# Altium PCB TS-4900 Yonder Parent.PcbDoc (part 1 of 2)
Units mil, origin at the board's own origin, x right, y up, seen from the top; angles counter-clockwise.
Board outline 3838 x 4094 mil, 4 copper layers (Component Side, Ground Plane, Power Plane, Solder Side), stack 33.234 mil thick; 152 components, 102 nets, 692 pads, 286 vias.
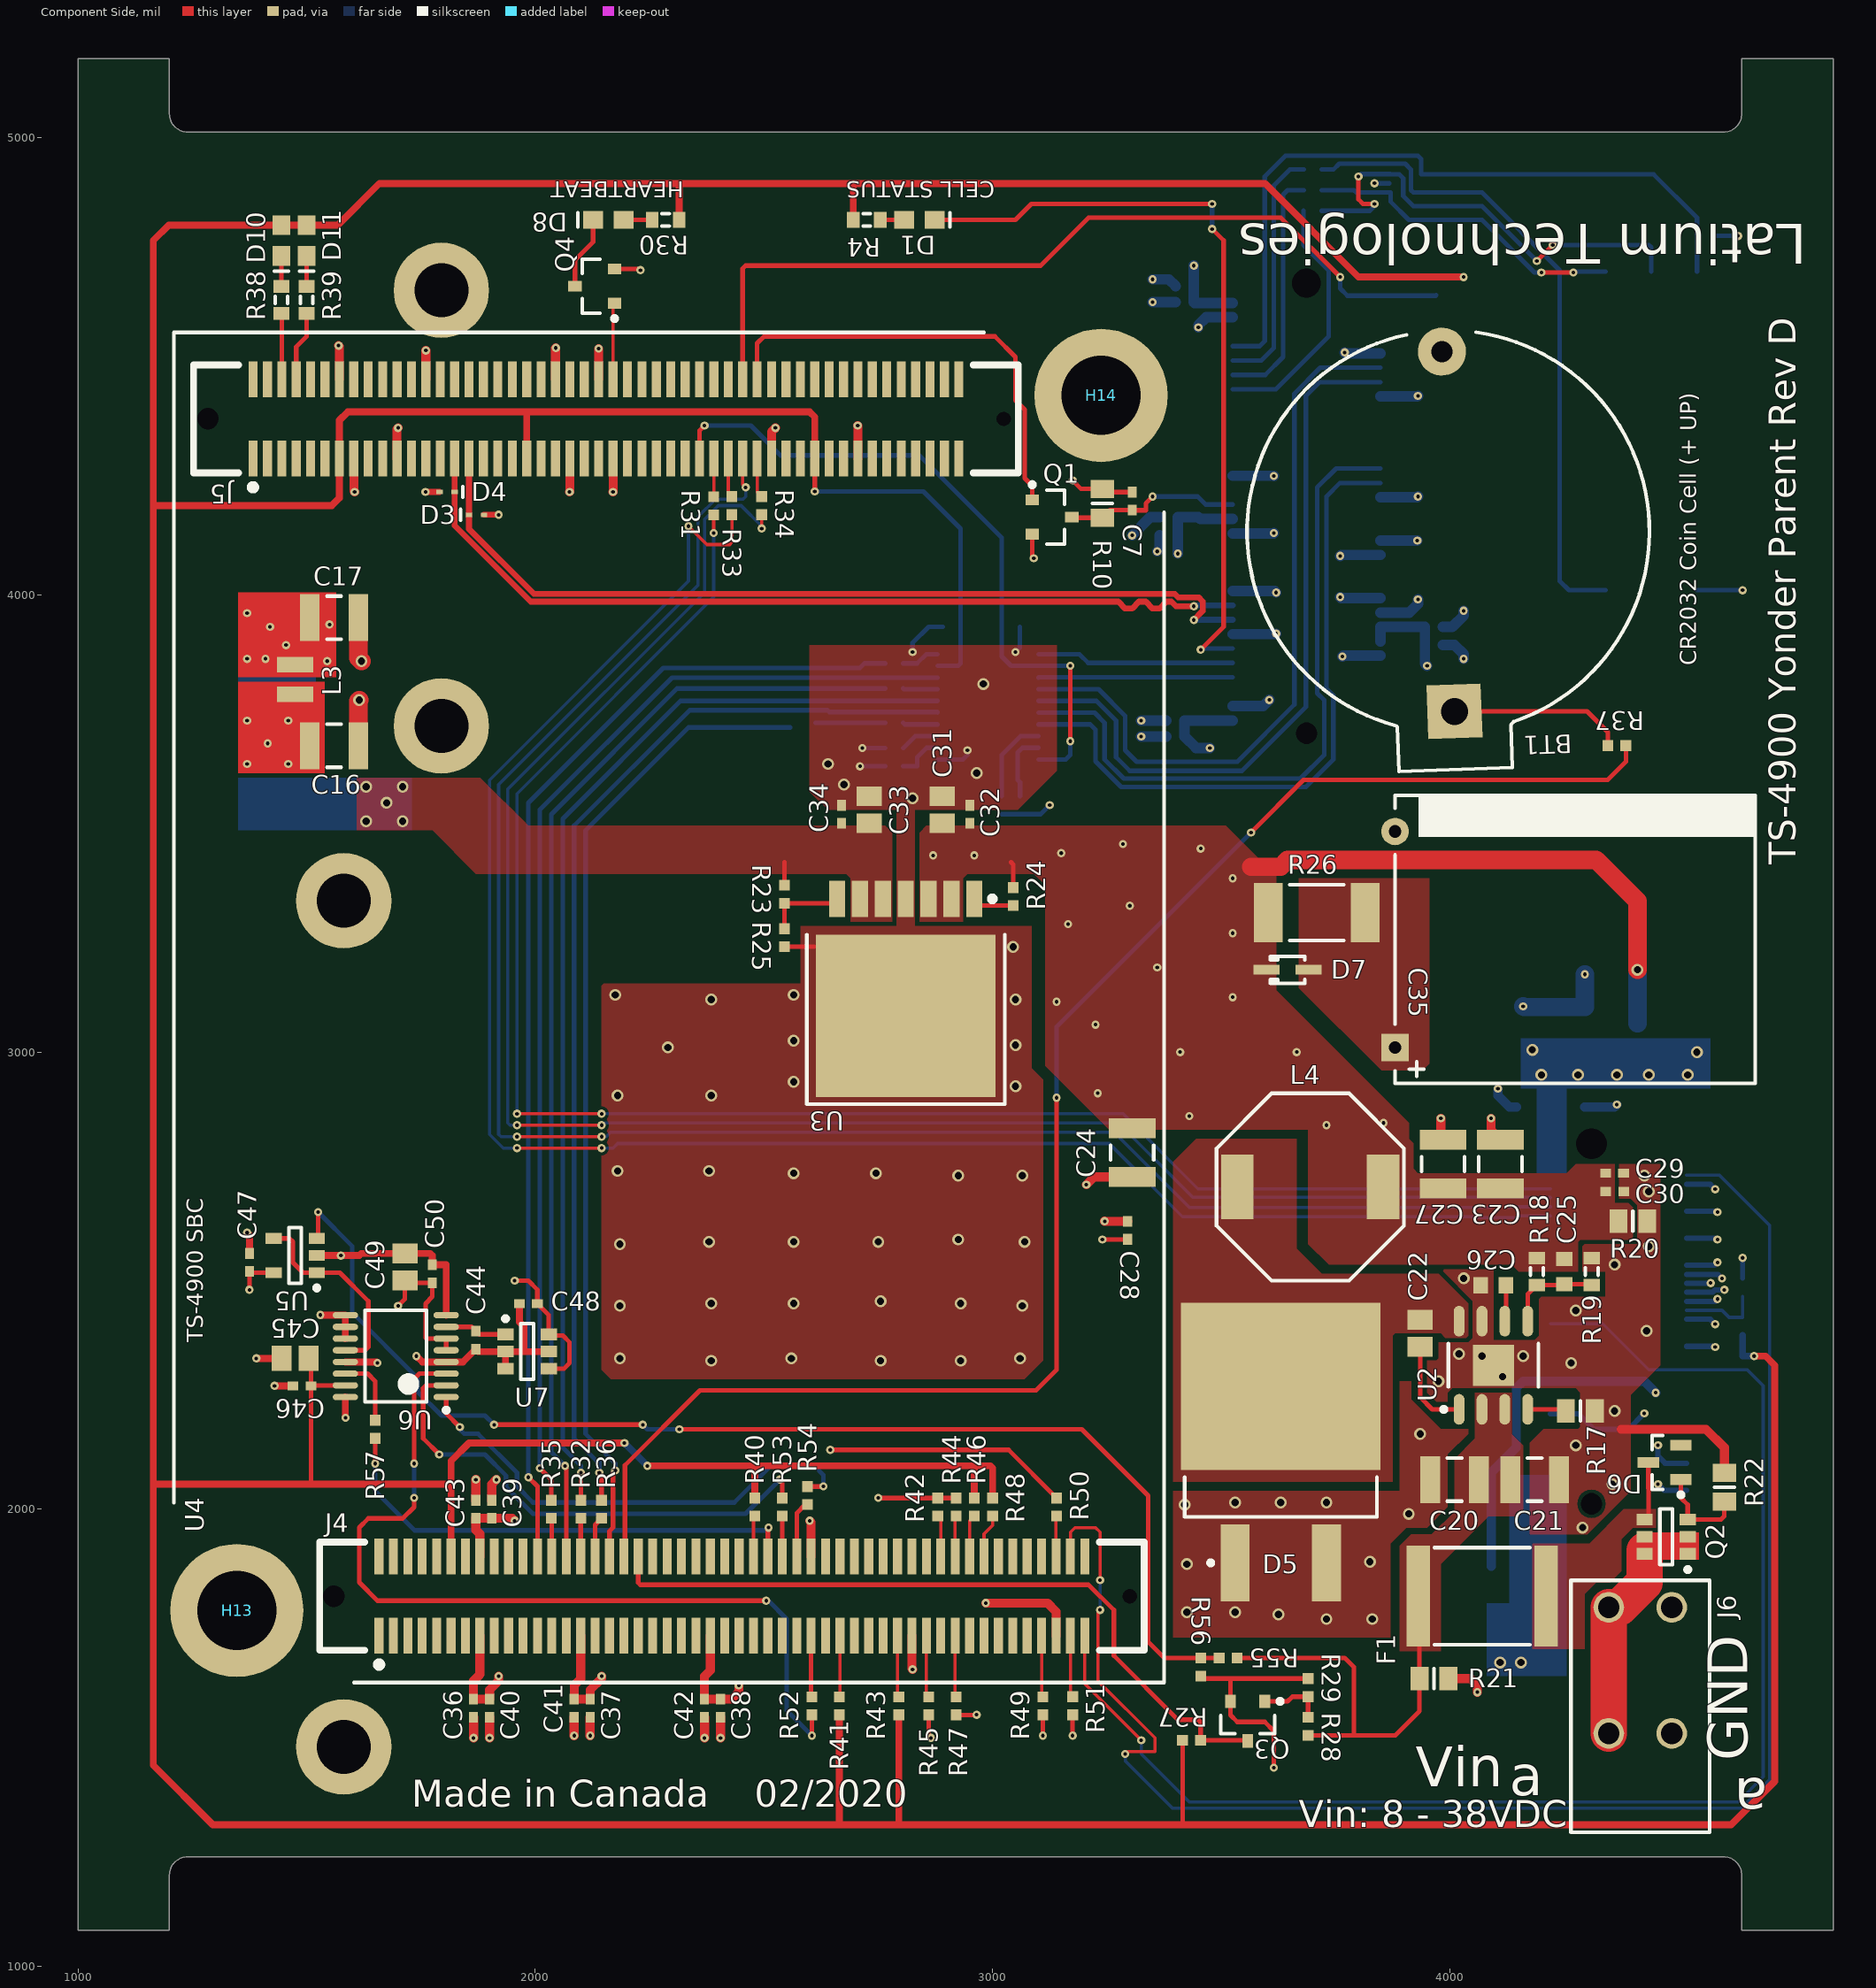
[diagram p0: Component Side view]
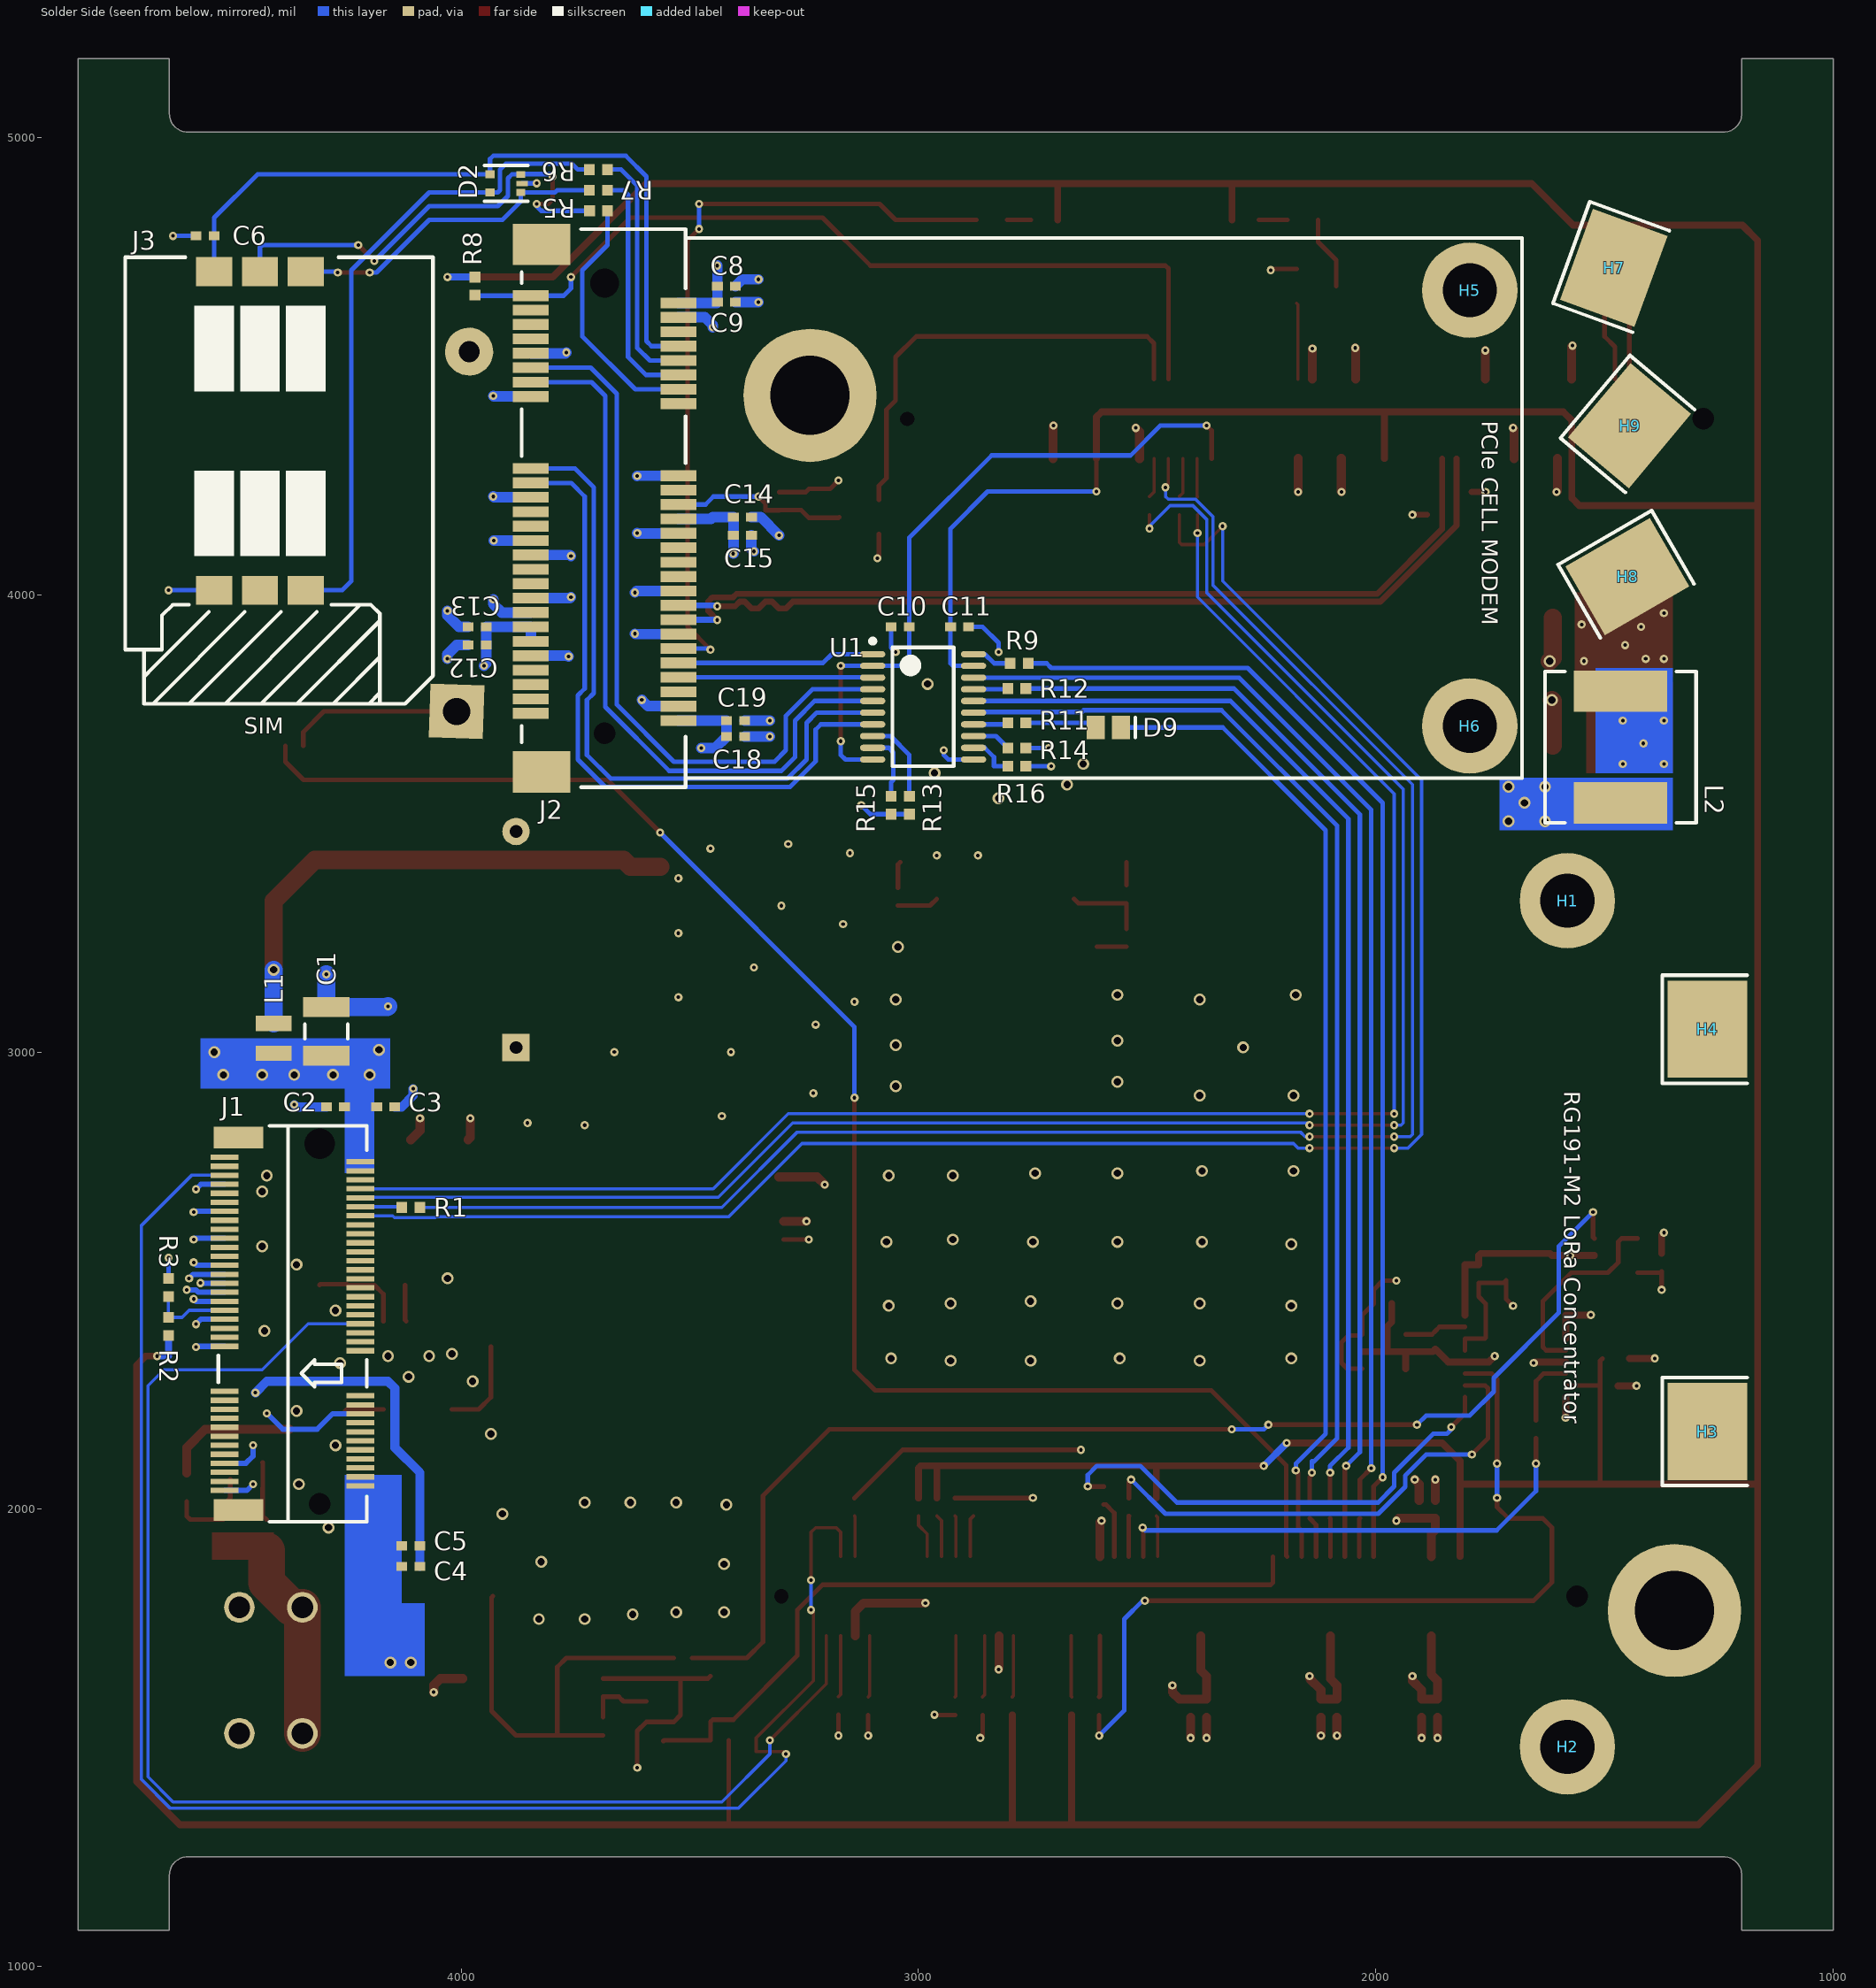
[diagram p1: Solder Side view, seen from below]
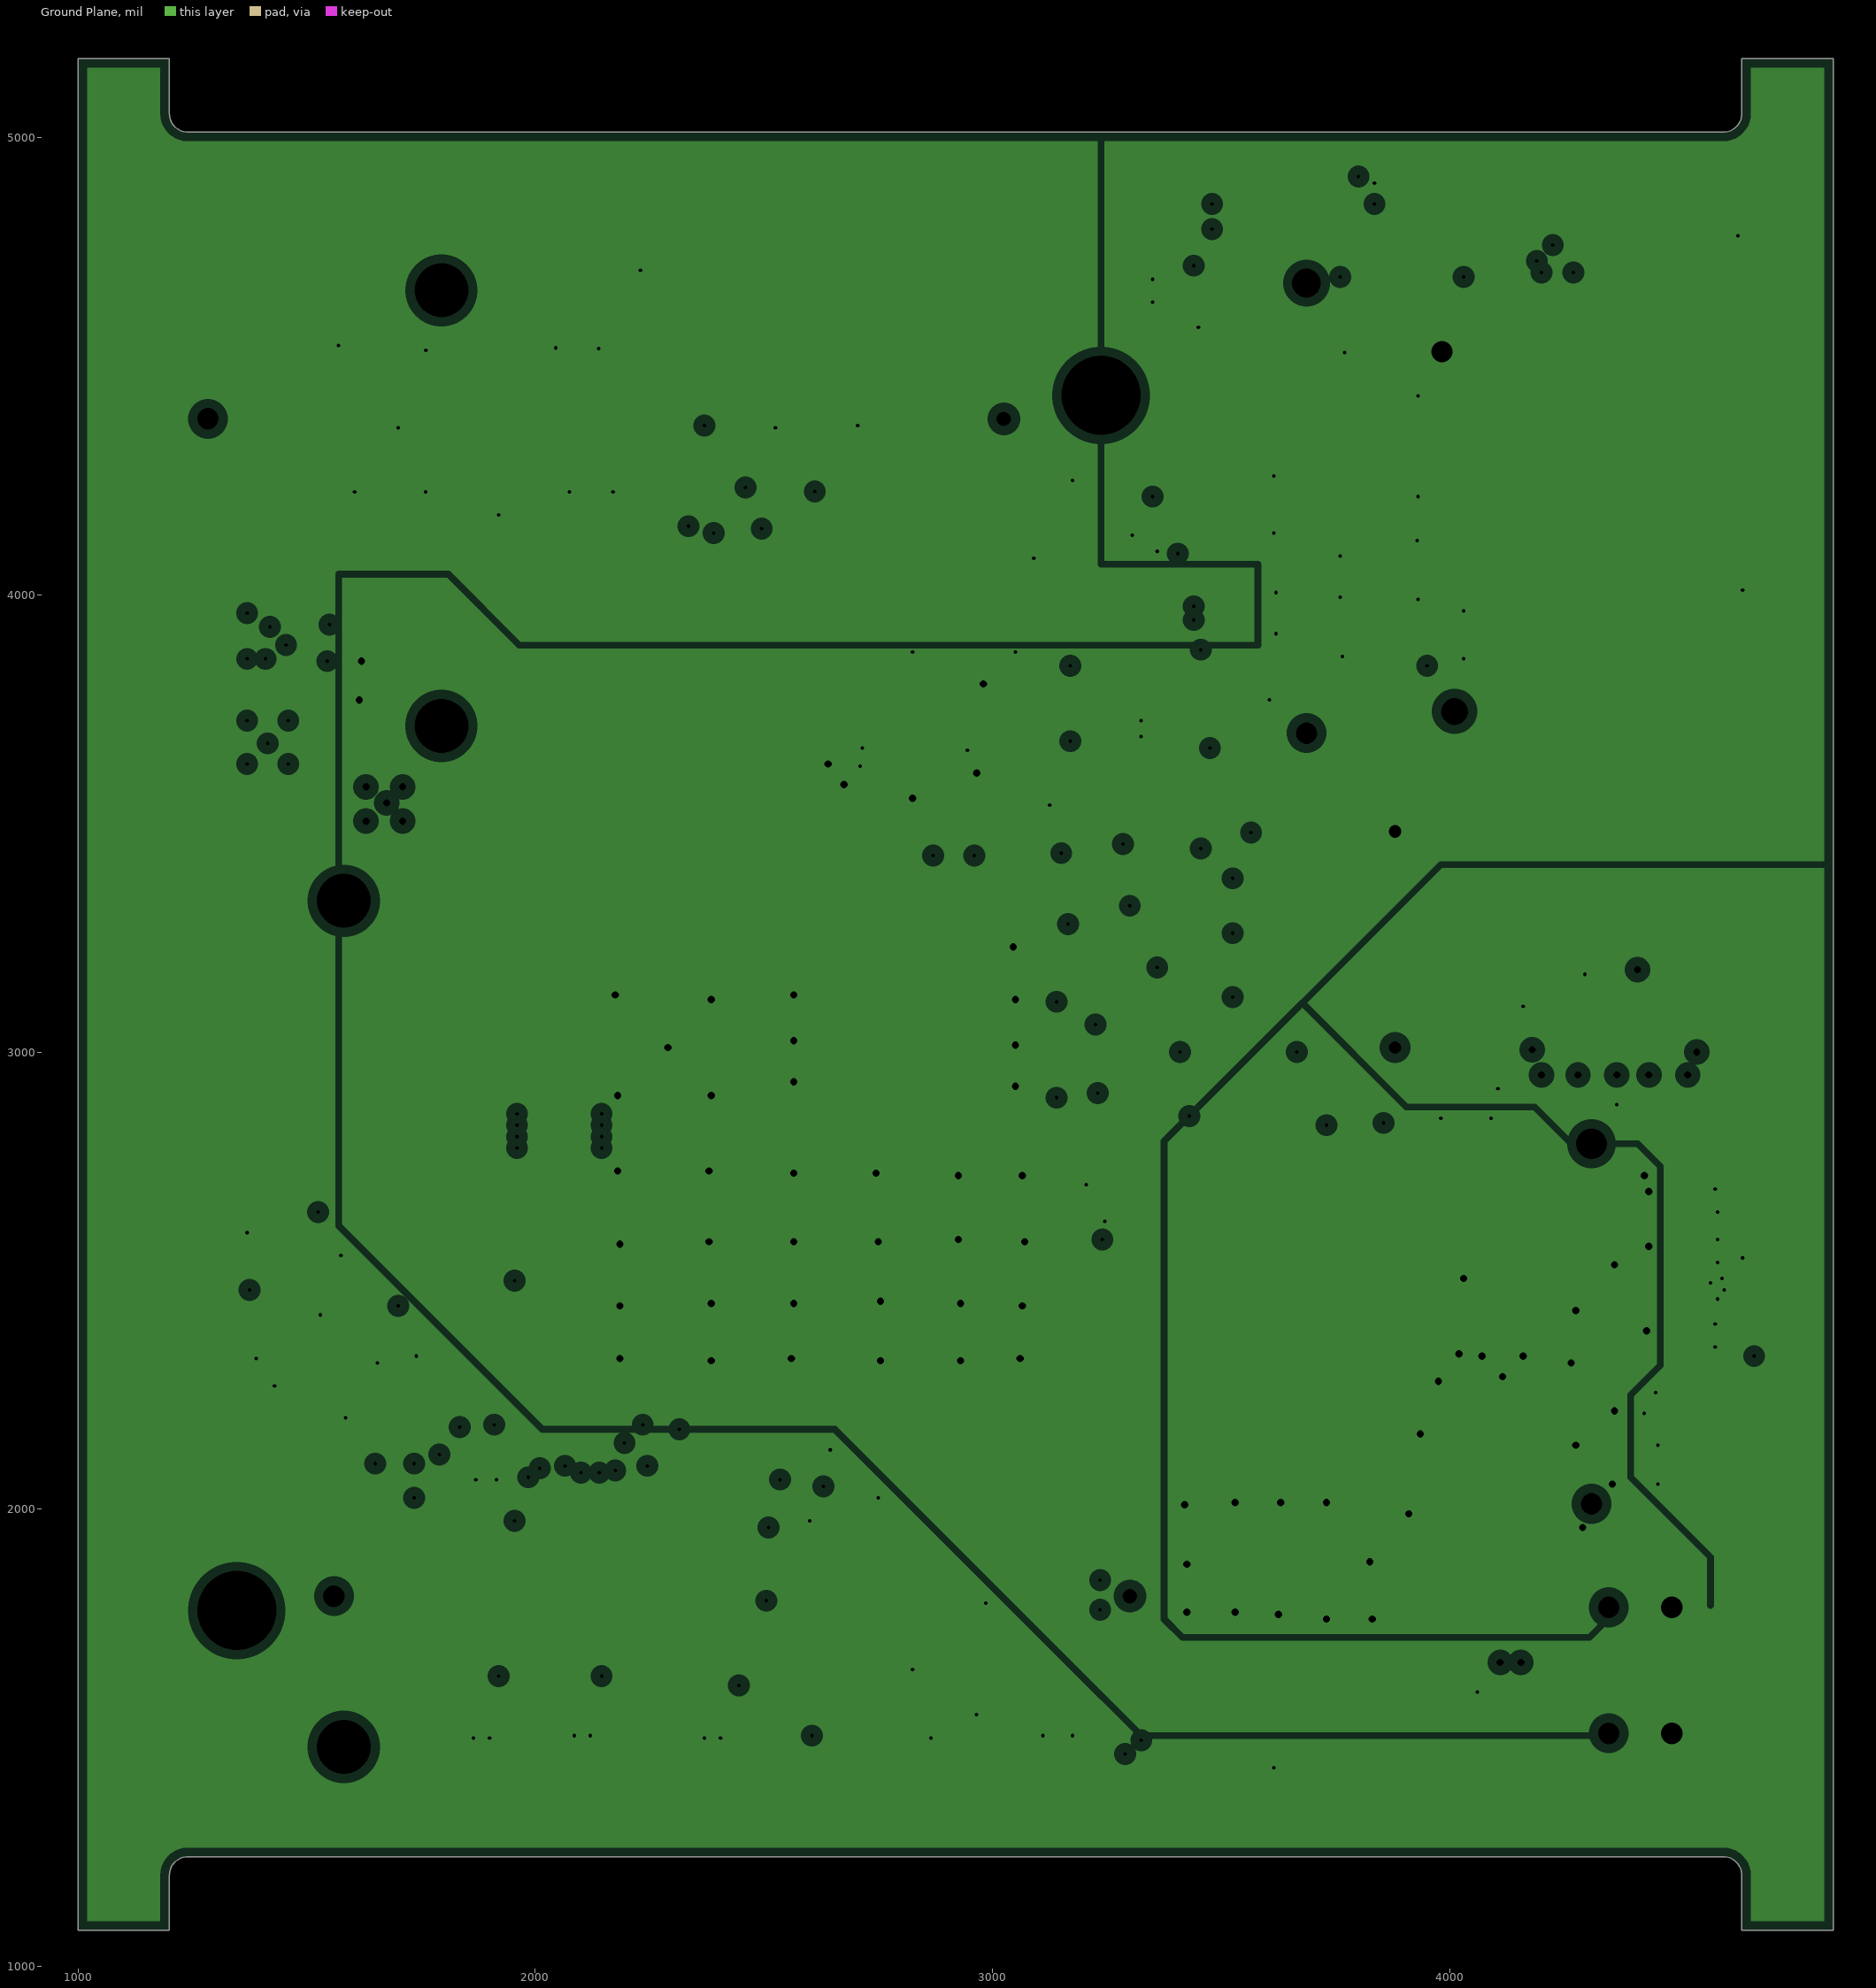
[diagram p2: Ground Plane, clearances drawn from the general rule]
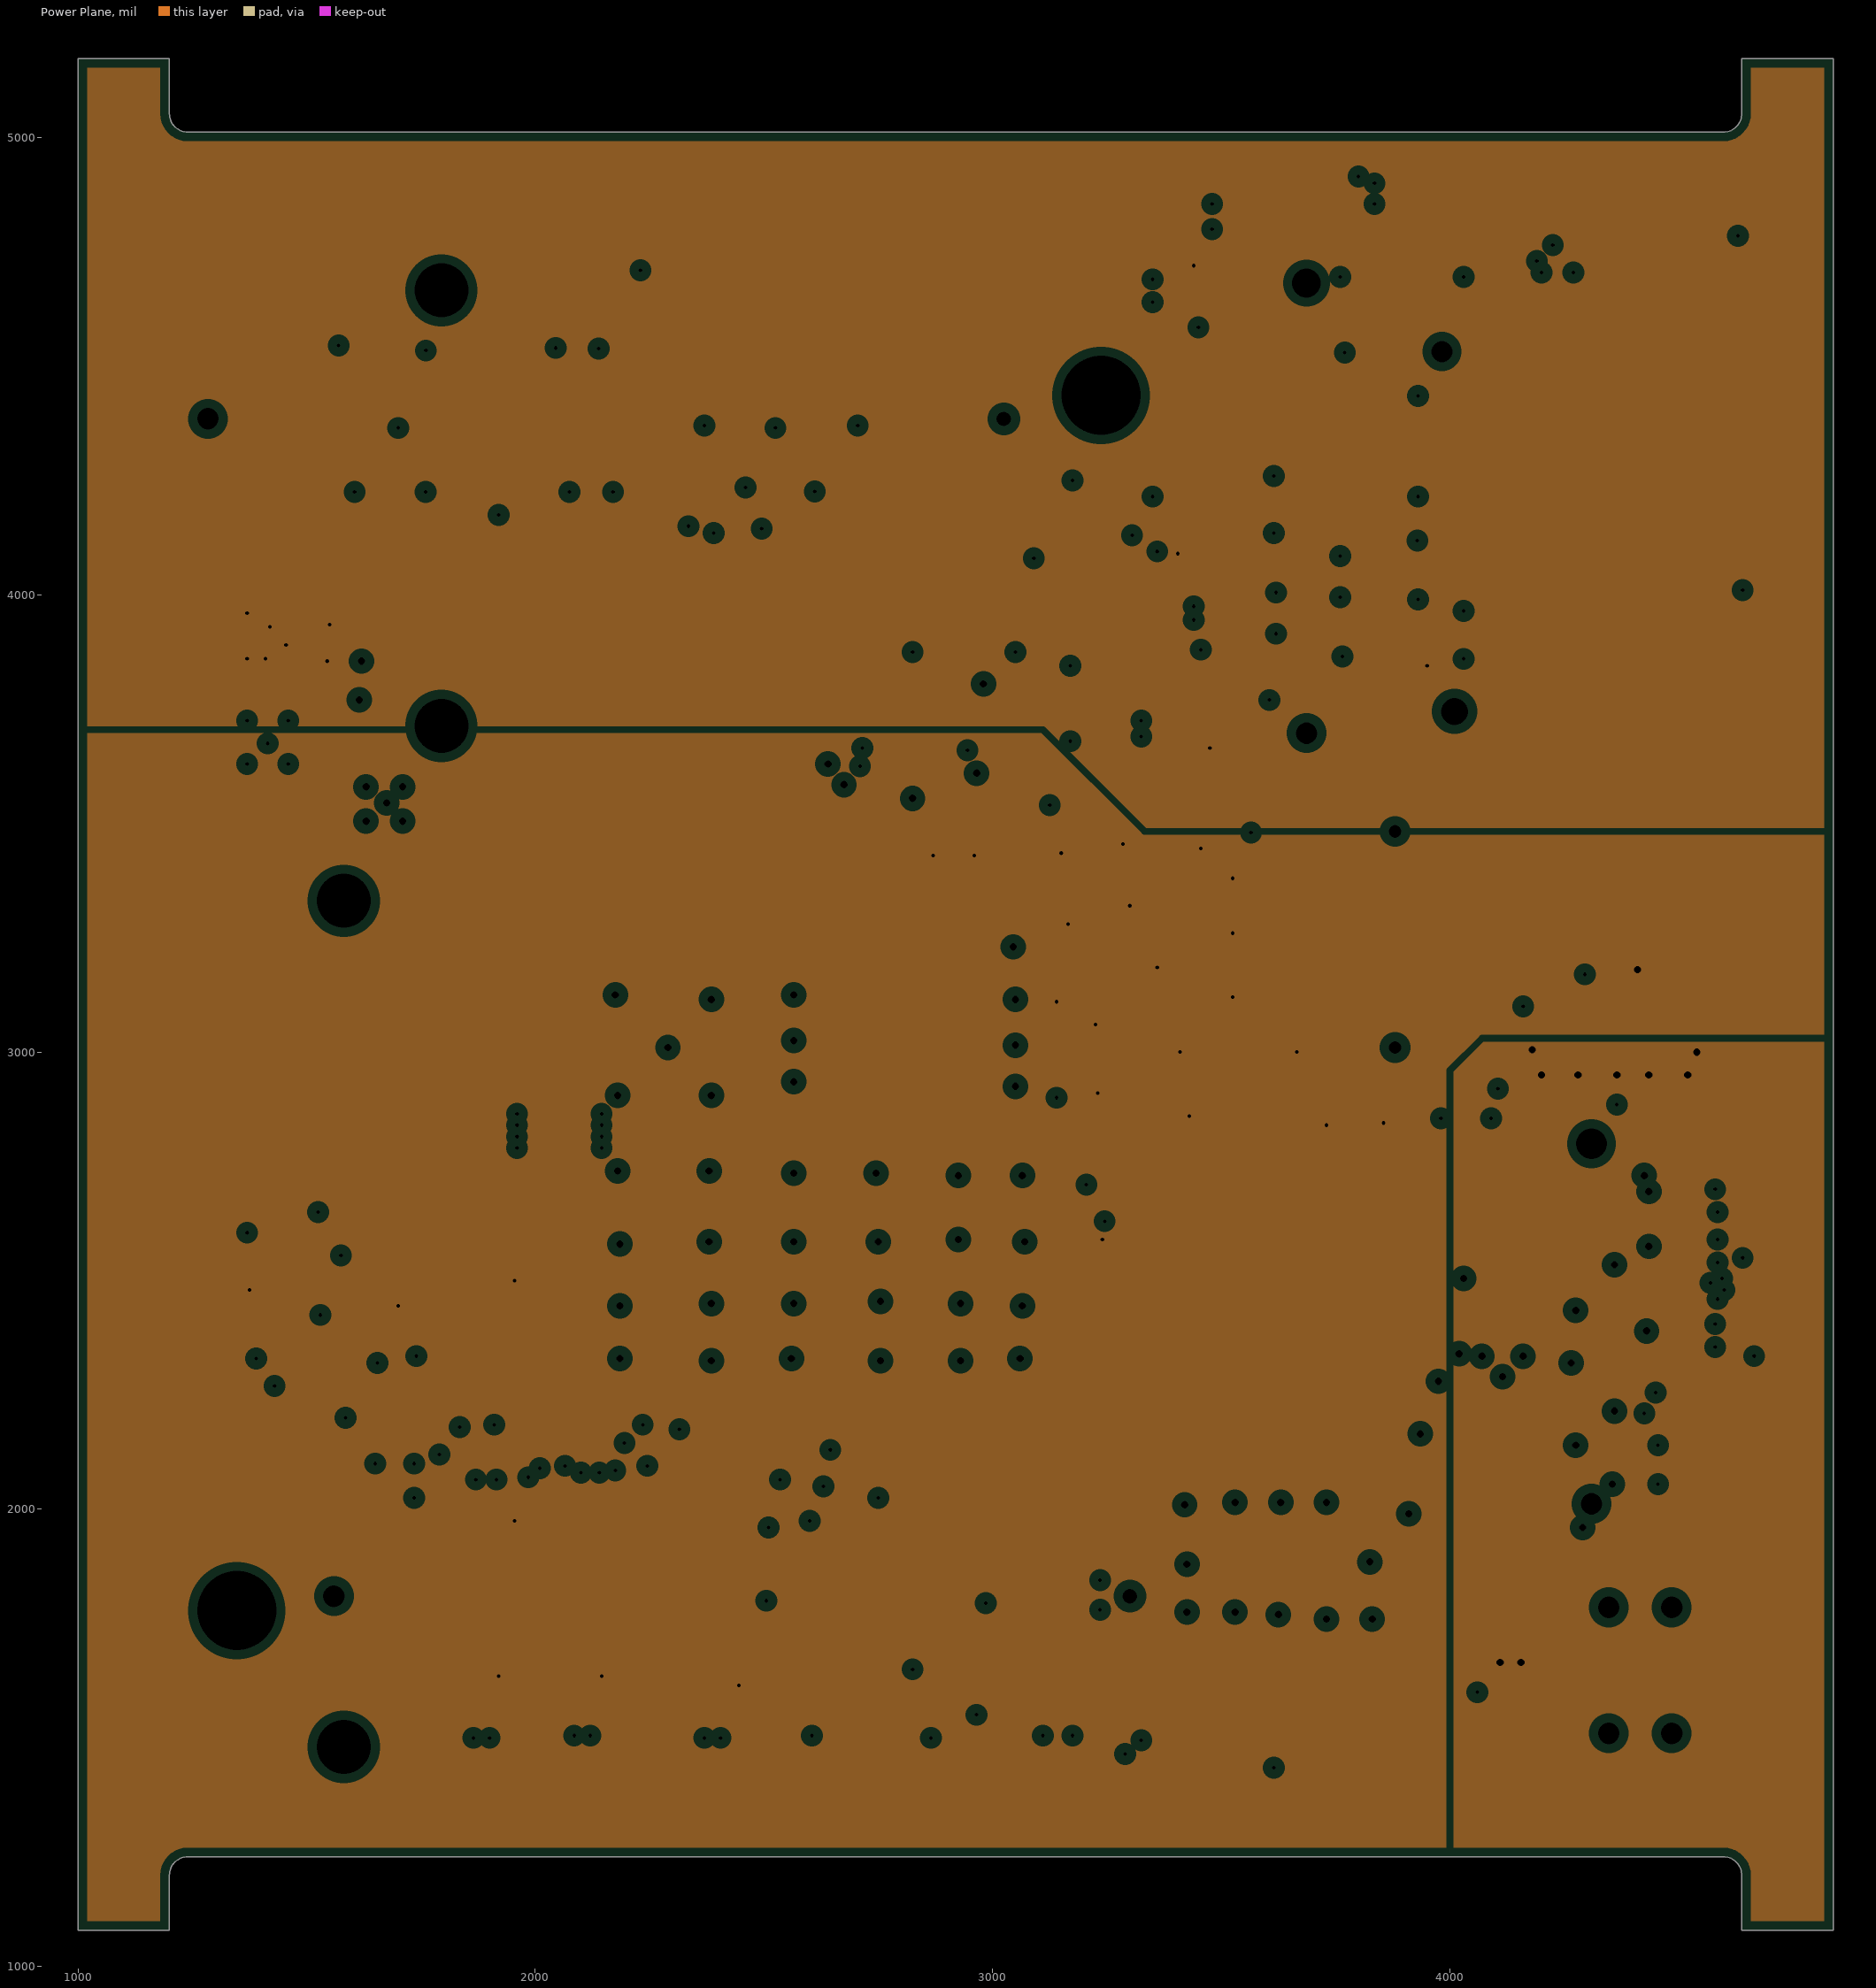
[diagram p3: Power Plane, clearances drawn from the general rule]

## Layer stack, top to bottom
Top Solder: solder mask 0.4, Solder Resist, Dk 3.5
Component Side: signal copper 1.4
Dielectric 1: core 12.6, FR-4, Dk 4.8
Ground Plane: plane copper 1.417, net GND
Dielectric 3: prepreg 5, Dk 4.2
Power Plane: plane copper 1.417, net (Multiple Nets)
Dielectric 4: core 10, Dk 4.2
Solder Side: signal copper 1.4
Bottom Solder: solder mask 0.4, Solder Resist, Dk 3.5

## Board outline
1000,1079 1200,1079 1200,1200 cw(c1240,1200) 1240,1240 4598,1240 cw(c4598,1200) 4638,1200 4638,1079 4838,1079 4838,5173 4638,5173 4638,5052 cw(c4598,5052) 4598,5012 1240,5012 cw(c1240,5052) 1200,5052 1200,5173 1000,5173

## Design rules (kind name [scope] priority, off if disabled: settings)
Clearance USB [InNet('M_USB_DN') vs InNet('M_USB_DP')] p1: gap=4 ignorepadtopadclearanceinfootprint=FALSE
Clearance "Net D2_1" [InNet('NetD2_1') vs InNet('GND')] p2: gap=6.3 ignorepadtopadclearanceinfootprint=FALSE
Clearance "Net D2_3" [InNet('NetD2_3') vs InNet('GND')] p3: gap=6.3 ignorepadtopadclearanceinfootprint=FALSE
Clearance [All] p4: gap=7 ignorepadtopadclearanceinfootprint=FALSE
ComponentClearance "TS4900 - Bottom Spacer 1" [InComponent('U4') vs InComponent('H6')] p1: gap=0 collisioncheckmode=3 verticalgap=0 showdistances=FALSE
ComponentClearance "TS4900 - Bottom Spacer 2" [InComponent('U4') vs InComponent('H5')] p2: gap=0 collisioncheckmode=3 verticalgap=0 showdistances=FALSE
ComponentClearance "LoRa Spacer 1" [InComponent('H1') vs InComponent('J1')] p3: gap=0 collisioncheckmode=3 verticalgap=0 showdistances=FALSE
ComponentClearance "LoRa Spacer 2" [InComponent('H2') vs InComponent('J1')] p4: gap=0 collisioncheckmode=3 verticalgap=0 showdistances=FALSE
ComponentClearance "Modem Spacer 2" [InComponent('H6') vs InComponent('J2')] p5: gap=0 collisioncheckmode=3 verticalgap=0 showdistances=FALSE
ComponentClearance "Modem Spacer 1" [InComponent('H5') vs InComponent('J2')] p6: gap=0 collisioncheckmode=3 verticalgap=0 showdistances=FALSE
ComponentClearance "TS-4900 Spacer 1" [InComponent('U4') vs InComponent('H14')] p7: gap=0 collisioncheckmode=3 verticalgap=0 showdistances=FALSE
ComponentClearance "TS-4900 Spacer 2" [InComponent('U4') vs InComponent('H13')] p8: gap=0 collisioncheckmode=3 verticalgap=0 showdistances=FALSE
ComponentClearance "TS-4900 Right Header" [InComponent('U4') vs InComponent('J5')] p9: gap=0 collisioncheckmode=3 verticalgap=0 showdistances=FALSE
ComponentClearance "TS-4900 Left Header" [InComponent('U4') vs InComponent('J4')] p10: gap=0 collisioncheckmode=3 verticalgap=0 showdistances=FALSE
ComponentClearance [All] p11 off: gap=5 collisioncheckmode=3 verticalgap=10 showdistances=FALSE
Height [All] p1 off: minheight=0 maxheight=2500 prefheight=500
HoleSize [All] p1: absolutevalues=TRUE maxlimit=250 minlimit=1 maxpercent=80.000 minpercent=20.000
MinimumSolderMaskSliver [All] p1: minsoldermaskwidth=2
PlaneClearance USBClearance [All] p1: clearance=30
PlaneClearance [All] p2: clearance=20
PlaneConnect [All] p1: planeconnectstyle=Direct reliefexpansion=20 reliefentries=4 reliefconductorwidth=10 reliefairgap=10
PolygonConnect [All] p1: connectstyle=Direct reliefconductorwidth=10 reliefentries=4 polygonreliefangle="90 Angle" airgapwidth=10
RoutingVias [All] p1: holewidth=8 width=18 viastyle="Through Hole" minholewidth=8 minwidth=18 maxholewidth=28 maxwidth=50
SilkToSilkClearance [All] p1: silktosilkclearance=5
SilkToSolderMaskClearance [IsPad] p1: minsilkscreentomaskgap=2 clearancetoexposedcopper=TRUE
SolderMaskExpansion [All] p1: expansion=0
Width [All] p1: maxlimit=250 minlimit=7 preferedwidth=10
22 further rules are at their usual default settings.

## Classes and differential pairs
component class "TS-4900 Headers": C36 C37 C38 C39 C40 C41 C42 C43 D8 D10 D11 H13 H14 J4 J5 Q4 R30 R31 R32 R33 R34 R35 R36 R38 R39 R40 R41 R42 R43 R44 R45 R46 R47 R48 R49 R50 R51 R52 R53 R54 U4
component class "Power Supplies": BT1 C20 C21 C22 C23 C24 C25 C26 C27 C28 C29 C30 C31 C32 C33 C34 C35 D5 D6 D7 F1 J6 L4 Q2 Q3 R17 R18 R19 R20 R21 R22 R23 R24 R25 R26 R27 R28 R29 R37 U2 U3
component class "PCIe Cell Modem": C6 C7 C8 C9 C10 C11 C12 C13 C14 C15 C16 C17 C18 C19 D1 D2 D3 D4 D9 H5 H6 H7 H8 H9 J2 J3 L2 L3 Q1 R4 R5 R6 R7 R8 R9 R10 R11 R12 R13 R14 R15 R16 U1
component class "LoRa Concentrator": C1 C2 C3 C4 C5 H1 H2 H3 H4 J1 L1 R1 R2 R3
component class "External ADC and Reference": C44 C45 C46 C47 C48 C49 C50 R55 R56 R57 U5 U6 U7

## Components (designator, comment, footprint, x,y, rotation, side; value= is the part's Value field where it differs from the comment)
BT1 "Battery" "MPD BS-7" 4010,3745 r272 top value="CR2032 Coin Cell Holder"
C1 "100uF 10V 20% X5R" C1210_L 4295,3045 r270 bottom
C2 "0.1uF 50V 10% X7R" CAPC1005L 4275,2880 r0 bottom
C3 "1nF 50V 10% X7R" CAPC1005L 4165,2880 r180 bottom
C4 "0.1uF 50V 10% X7R" CAPC1005L 4110,1875 r180 bottom
C5 "1nF 50V 10% X7R" CAPC1005L 4110,1920 r180 bottom
C6 "0.1uF 50V 10% X7R" CAPC1005L 4560,4785 r0 bottom
C7 "0.1uF 50V 10% X7R" CAPC1005L 3305,4205 r90 top
C8 "0.1uF 50V 10% X7R" CAPC1005L 3420,4675 r180 bottom
C9 "1nF 50V 10% X7R" CAPC1005L 3420,4640 r180 bottom
C10 "0.1uF 50V 10% X7R" CAPC1005L 3040,3930 r0 bottom
C11 "0.1uF 50V 10% X7R" CAPC1005L 2910.32,3930 r180 bottom
C12 "0.1uF 50V 10% X7R" CAPC1005L 3965,3890 r0 bottom
C13 "1nF 50V 10% X7R" CAPC1005L 3965,3930 r0 bottom
C14 "0.1uF 50V 10% X7R" CAPC1005L 3385,4170 r180 bottom
C15 "1nF 50V 10% X7R" CAPC1005L 3385,4130 r180 bottom
C16 "100uF 10V 20% X5R" C1210_L 1560,3670 r180 top
C17 "100uF 10V 20% X5R" C1210_L 1560,3950 r180 top
C18 "0.1uF 50V 10% X7R" CAPC1005L 3400,3690 r180 bottom
C19 "1nF 50V 10% X7R" CAPC1005L 3400,3725 r180 bottom
C20 "10uF 63V 10% X7R" C1210_L 4010,2065 r0 top
C21 "10uF 63V 10% X7R" C1210_L 4185,2065 r180 top
C22 "0.1uF 100V 10% X7R" C0805 3935,2385 r270 top
C23 "100uF 10V 20% X5R" C1210_L 4110,2755 r270 top
C24 "100uF 10V 20% X5R" C1210_L 3305,2780 r90 top
C25 "220pF 50V 10% X7R" 1608[0603] 4250,2520 r90 top
C26 "8.2nF 50V 5% NP0" 1608[0603] 4095,2490 r0 top
C27 "100uF 10V 20% X5R" C1210_L 3985,2755 r270 top
C28 "0.1uF 50V 10% X7R" CAPC1005L 3295,2610 r90 top
C29 "0.1uF 50V 10% X7R" CAPC1005L 4360,2735 r0 top
C30 "0.1uF 50V 10% X7R" CAPC1005L 4360.31,2695 r0 top
C31 "10uF 16V 10% X5R" C0805 2890,3530 r90 top
C32 "0.1uF 50V 10% X7R" CAPC1005L 2950,3520 r90 top
C33 "10uF 16V 10% X5R" C0805 2730,3530 r90 top
C34 "0.1uF 50V 10% X7R" CAPC1005L 2670,3520 r90 top
C35 "0.5F 5.5V -10% +30%" "ILLINOIS SUPERCAP" 3880,3010 r180 top
C36 "0.1uF 50V 10% X7R" CAPC1005L 1865,1565 r270 top
C37 "0.1uF 50V 10% X7R" CAPC1005L 2120,1565 r270 top
C38 "0.1uF 50V 10% X7R" CAPC1005L 2405,1565 r270 top
C39 "0.1uF 50V 10% X7R" CAPC1005L 1905,2000 r90 top
C40 "1nF 50V 10% X7R" CAPC1005L 1900,1565 r270 top
C41 "1nF 50V 10% X7R" CAPC1005L 2085,1565 r270 top
C42 "1nF 50V 10% X7R" CAPC1005L 2370,1565 r270 top
C43 "1nF 50V 10% X7R" CAPC1005L 1870,2000 r90 top
C44 "0.1uF 50V 10% X7R" CAPC1005L 1870,2370 r270 top
C45 "10uF 10V 20% Tant" C0805 1475,2330 r180 top
C46 "0.1uF 50V 10% X7R" CAPC1005L 1490,2270 r180 top
C47 "0.1uF 50V 10% X7R" CAPC1005L 1375,2540 r90 top
C48 "0.1uF 50V 10% X7R" CAPC1005L 1985,2450 r180 top
C49 "10uF 10V 20% Tant" C0805 1715,2530 r90 top
C50 "0.1uF 50V 10% X7R" CAPC1005L 1775,2515 r90 top
D1 "Green 2V 20mA" CD1608-0603 2840,4820 r0 top
D2 "PESD3V3L4UW,115" SOT-665 3870,4880 r90 bottom
D3 "ESD9L5.0ST5G" SOD-923 1888,4175 r180 top
D4 "ESD9L5.0ST5G" SOD-923 1790.63,4225 r0 top
D5 "STPS20M100SG" ONSC-D2PAK-3-418AJ_A_V 3630,2125 r90 top
D6 "BZX84C10LT1G" SOT23-3_L 4469.57,2102.6 r180 top
D7 "1A 30V" SOD323 3645,3180 r180 top
D8 "Green 2V 20mA" CD1608-0603 2160,4820 r180 top
D9 "30V 30mA" CD1310-0504 2585,3710 r180 bottom
D10 "Red 2V 20mA" CD1608-0603 1445,4775 r270 top
D11 "Green 2V 20mA" CD1608-0603 1500,4775 r270 top
F1 "3A 24V" 2920 4210,1810 r180 top
H1 "9774015243R" "WURTH 9774015243R" 1581.22,3330.87 r180 bottom locked
H2 "9774015243R" "WURTH 9774015243R" 1581.22,1480.47 r180 bottom locked
H3 "S8101-46R" "COAX CABLE CLIP" 1275,2170 r90 bottom locked
H4 "S8101-46R" "COAX CABLE CLIP" 1275,3050 r90 bottom locked
H5 "9774030243R" "WURTH 9774030243R" 1794.68,4665.94 r180 bottom locked
H6 "9774030243R" "WURTH 9774030243R" 1794.68,3713.19 r180 bottom locked
H7 "S8101-46R" "COAX CABLE CLIP" 1480,4715 r110 bottom locked
H8 "S8101-46R" "COAX CABLE CLIP" 1450,4040 r150 bottom locked
H9 "S8101-46R" "COAX CABLE CLIP" 1445,4370 r130 bottom locked
H13 "9774030360R" "WURTH 9774060360R" 1347.32,1778.5 r0 top locked
H14 "9774030360R" "WURTH 9774060360R" 3237.09,4435.98 r0 top locked
J1 "2199119-4" "TE 2199119-4" 4517.24,2041.5 r90 bottom locked
J2 "1775838-2" "TE 1775838-2" 3847.83,4654.13 r270 bottom locked
J3 "SIM5051-6-0-18-00-A" SIM5051-6 4540,4706.85 r180 bottom
J4 "61083-102402LF" "TS 100 PIN HEADER" 1658.35,1723.39 r0 top locked
J5 "61083-102402LF" "TS 100 PIN HEADER" 1382.76,4298.19 r0 top locked
J6 "1824420000" 1824420000 4347.2,1785.59 r0 top
L1 "1uH 4.3A R042" "WE-LQS 252012" 4410,3030 r270 bottom
L2 "6.8uH 4.5A R0264" 1267AY 1465,3545 r90 bottom locked
L3 "1uH 4.3A R042" "WE-LQS 252012" 1475,3815 r90 top
L4 "3uH 6.2A R0072" SRU1048 3535,2705 r0 top
Q1 "2N7002" INF-PG-SOT23_L 3130,4170 r0 top
Q2 "DMP6110SVT-7" SOT23-6_L 4472.76,1940 r180 top
Q3 "2N7002" INF-PG-SOT23_L 3557.6,1536.69 r270 top
Q4 "2N7002" INF-PG-SOT23_L 2130,4675 r180 top
R1 "33R 1% 63mW" RESC1005L 4110,2660 r180 bottom
R2 "10k 1% 63mW" RESC1005L 4640,2400 r270 bottom
R3 "10k 1% 63mW" RESC1005L 4640,2485 r270 bottom
R4 "75R 1% 100mW" RESC1608L 2725,4820 r0 top
R5 "22R 1% 63mW" RESC1005L 3699.69,4840 r180 bottom
R6 "22R 1% 63mW" RESC1005L 3700,4930 r180 bottom
R7 "22R 1% 63mW" RESC1005L 3700,4885 r180 bottom
R8 "10k 1% 63mW" RESC1005L 3970,4675 r90 bottom
R9 "33R 1% 63mW" RESC1005L 2780,3850 r0 bottom
R10 "3.5V 120A" 6-0805_L 3240,4200 r270 top
R11 "33R 1% 63mW" RESC1005L 2785,3720 r0 bottom
R12 "33R 1% 63mW" RESC1005L 2785,3795 r0 bottom
R13 "100k 1% 63mW" RESC1005L 3020,3540 r270 bottom
R14 "100k 1% 63mW" RESC1005L 2785,3665 r0 bottom
R15 "100k 1% 63mW" RESC1005L 3060,3540 r270 bottom
R16 "100k 1% 63mW" RESC1005L 2785,3625 r0 bottom
R17 "24.9k 1% 125mW" 6-0805_L 4285,2215 r180 top
R18 "68k 1% 100mW" J1-0603 4190,2520 r90 top
R19 "12k 1% 100mW" J1-0603 4310,2520 r270 top
R20 "5.5V 120A" 6-0805_L 4400,2630 r180 top
R21 "14V 120A" 6-0805_L 3965,1630 r180 top
R22 "2.2k 1% 125mW" 6-0805_L 4600,2048.5 r270 top
R23 "10k 1% 63mW" RESC1005L 2545,3345 r90 top
R24 "100k 1% 63mW" RESC1005L 3045,3340 r90 top
R25 "1.5k 1% 63mW" RESC1005L 2545,3250 r90 top
R26 "3.3R 5% 3W" RESC6432AL 3708.7,3305 r0 top
R27 "10k 1% 63mW" RESC1005L 3435,1495 r180 top
R28 "100k 1% 63mW" RESC1005L 3690,1525.32 r270 top
R29 "100k 1% 63mW" RESC1005L 3690,1610 r270 top
R30 "150R 1% 100mW" RESC1608L 2285,4820 r180 top
R31 "33R 1% 63mW" RESC1005L 2390,4194.69 r270 top
R32 "33R 1% 63mW" RESC1005L 2100,2000 r270 top
R33 "33R 1% 63mW" RESC1005L 2430,4195 r270 top
R34 "33R 1% 63mW" RESC1005L 2495,4195 r270 top
R35 "33R 1% 63mW" RESC1005L 2035,2000 r270 top
R36 "33R 1% 63mW" RESC1005L 2145,2000 r270 top
R37 "1.5k 1% 63mW" RESC1005L 4365,3670 r0 top
R38 "150R 1% 100mW" RESC1608L 1445,4645 r90 top
R39 "150R 1% 100mW" RESC1608L 1500,4645 r90 top
R40 "1k 1% 63mW" RESC1005L 2480,2005 r270 top
R41 "1k 1% 63mW" RESC1005L 2665,1570 r270 top
R42 "1k 1% 63mW" RESC1005L 2880,2005 r270 top
R43 "1k 1% 63mW" RESC1005L 2795,1570 r270 top
R44 "1k 1% 63mW" RESC1005L 2920,2005 r270 top
R45 "1k 1% 63mW" RESC1005L 2860,1570 r270 top
R46 "1k 1% 63mW" RESC1005L 2960,2005 r270 top
R47 "1k 1% 63mW" RESC1005L 2920,1570 r270 top
R48 "1k 1% 63mW" RESC1005L 3000,2005 r270 top
R49 "1k 1% 63mW" RESC1005L 3110,1570 r270 top
R50 "1k 1% 63mW" RESC1005L 3140,2005 r270 top
R51 "1k 1% 63mW" RESC1005L 3175,1570.32 r270 top
R52 "33R 1% 63mW" RESC1005L 2605,1570 r270 top
R53 "33R 1% 63mW" RESC1005L 2540,2005 r270 top
R54 "33R 1% 63mW" RESC1005L 2595,2030 r270 top
R55 "100k 1% 63mW" RESC1005L 3515,1675 r0 top
R56 "10k 1% 63mW" RESC1005L 3455,1655 r90 top
R57 "33R 1% 63mW" RESC1005L 1650,2175 r270 top
U1 "TXB0108PWR" TSSOP20_L 2990,3755 r180 bottom
U2 "LMR14050SDDAR" MRA08A_L 4095,2315 r90 top
U3 "MIC69502WR-TR" SPAK-7 2960,3335 r180 top
U4 "Technologic Systems TS-4900" TS-4900 3374.88,1621.02 r90 top locked
U5 "OPA348AIDBVT" TI-DBV5_L 1475,2555 r180 top
U6 "AD7923BRUZ-REEL7" RU-16_L 1695,2335 r180 top
U7 "MCP1501T-25E/CHY" SOT23-6_L 1982.24,2345 r0 top

## Footprints (in the part's own frame and the unit in brackets; to place one, negate y for a bottom-side part, rotate by r counter-clockwise, add the part's x,y. Pads: shape width x height; smd on the part's side, far side on the other; paste and mask are expansions set on the pad)
6-0805_L [mm] "Chip Resistor, Body 2.0x1.2mm, IPC High Density"
  rect 1x1.3 smd: 1(-0.8,0) 2(0.8,0)
  silkscreen extent 0,-0.55 0,0.55, body extent -1.07,-0.7 1.07,0.7, height 0.7
1267AY [mm] "muRata 8.3mm SMD Inductor"
  rect 2.3x5.2 smd: 1(0,0) 2(6.2,0)
  silkscreen extent -1.1,-4.2 7.3,4.2, body extent -1.1,-4.2 7.3,4.2, height 4
1608[0603] [mm] "Chip Capacitor, Body 1.6x0.8mm, IPC High Density"
  rect 0.8x0.9 smd: 1(-0.7,0) 2(0.7,0)
  body extent -0.87,-0.48 0.87,0.48, height 1.3
2920 [mm] "2920 SMD Footprint (7351 Metric)"
  rect 1.3x5.6 smd: 1(0,0) 2(7.1,0)
  silkscreen extent 0.9,-2.7 6.2,2.7, body extent -0.3,-2.7 7.5,2.7, height 1.1
1824420000 [mm] "Weidmuller 2 Pos Side Entry Terminal"
  round 1.7 hole 1.2: 1(0,0) 2(0,-7) 3(3.5,0) 4(3.5,-7)
  silkscreen extent -2.1,-12.5 5.6,1.5, body extent -2.1,-12.5 5.6,1.5, height 8.5
C0805 [mm] "Chip Capacitor, Body 2.0x1.3mm, IPC High Density"
  rect 1.1x1.4 smd: 1(-0.75,0) 2(0.75,0)
  body extent -1.1,-0.72 1.1,0.72, height 1.4
C1210_L [mm] "Chip Capacitor, Body 3.2x2.5mm, IPC High Density"
  rect 1.1x2.6 smd: 1(-1.35,0) 2(1.35,0)
  silkscreen extent -0.4,-1.2 0.4,1.2, body extent -1.7,-1.35 1.7,1.35, height 1.5
CAPC1005L [mm] "Chip Capacitor, Body 1.0x0.5mm, IPC High Density"
  rect 0.6x0.5 smd: 1(-0.5,0) 2(0.5,0)
  body extent -0.55,-0.3 0.55,0.3, height 0.6
CD1310-0504 [mm] "Chip Diode; Body 1.2 x 1.0 mm (LxW typ)"
  rect 1x1.3 smd: 1(-0.7,0) 2(0.7,0)
  silkscreen extent 1.5,-0.55 1.5,0.55
CD1608-0603 [mm] "Chip Diode; Body 1.6 x 0.8 mm (LxW typ)"
  rect 1.1x1 smd: 1(-0.85,0) 2(0.85,0)
  silkscreen extent 1.7,-0.4 1.7,0.4
"COAX CABLE CLIP" [mm] "Harwin Coaxial Cable Clip, use with U.FL - RP SMA Cable"
  rect 5.4x4.4 smd: MP(0,0)
  silkscreen extent -3,-2.2 3,2.5, body extent -2.7,-2.2 2.7,2.2, height 1.5
"ILLINOIS SUPERCAP" [mil] "Illinois DGH504Q5R5 - Mounted Horizontally"
  rect 60x60 hole 27.56: 1(0,0)
  round 60 hole 27.56: 2(0,-472.44)
  silkscreen extent -787,-551 0,79, body extent -787,-551 -118,79, height 531
INF-PG-SOT23_L [mm] "SOT23, 3-Leads, Body 2.9x1.3mm, Pitch 0.95mm, IPC High Density"
  rect 0.75x0.6 smd: 1(-1.1,0.95) 2(-1.1,-0.95) 3(1.1,0)
  silkscreen extent -1.22,-1.5 0.7,1.92, body extent -0.7,-1.5 0.7,1.5, height 1.1
J1-0603 [mm] "Chip Resistor, Body 1.6x0.8mm, IPC High Density"
  rect 0.7x0.9 smd: 1(-0.75,0) 2(0.75,0)
  silkscreen extent -0.2,-0.35 0.2,0.35, body extent -0.85,-0.48 0.85,0.48, height 0.9
"MPD BS-7" [mm] "Memory Protection Devices BS-7 2032 Coin Cell Holder"
  rect 3x3 hole 1.5: 1(0,0)
  round 2.67 hole 1.17: 2(-20,0)
  silkscreen extent -21.01,-11.17 3.23,11.17, body extent -21.17,-11.17 3.3,11.18, height 9
MRA08A_L [mm] "SOIC, 8-Leads, Body 4.9x3.9mm, Pitch 1.27mm, Exposed Pad, IPC High Density"
  oval 1.7x0.6 smd: 1(-2.45,1.905) 2(-2.45,0.635) 3(-2.45,-0.635) 4(-2.45,-1.905) 5(2.45,-1.905) 6(2.45,-0.635) 7(2.45,0.635) 8(2.45,1.905)
  rect 2.29x2.29 smd: 9(0,0)
  silkscreen extent -2.57,-2.5 1.2,2.88, body extent -2,-2.5 2,2.5, height 1.68
ONSC-D2PAK-3-418AJ_A_V [mil] "DPAK, 3-Leads, Body 10.16x9.015mm, Pitch 2.54mm"
  rect 169x63 smd: 1(-242.13,100) 3(-242.13,-100)
  rect 366x436 smd: 4(143.7,0)
  silkscreen extent -247,-210 -55,210, body extent -148,-200 207,200, height 196
RESC1005L [mm] "Chip Resistor, Body 1.1x0.5mm, IPC High Density"
  rect 0.6x0.6 smd: 1(-0.5,0) 2(0.5,0)
  body extent -0.55,-0.3 0.55,0.3, height 0.4
RESC1608L [mm] "Chip Resistor, Body 1.6x0.8mm, IPC High Density"
  rect 0.7x0.9 smd: 1(-0.75,0) 2(0.75,0)
  silkscreen extent -0.2,-0.35 0.2,0.35, body extent -0.85,-0.48 0.85,0.48, height 0.6
RESC6432AL [mm] "Chip Resistor, Body 6.4x3.2mm, IPC High Density"
  rect 1.6x3.3 smd: 1(-2.7,0) 2(2.7,0)
  silkscreen extent -1.5,-1.55 1.5,1.55, body extent -3.32,-1.73 3.32,1.73, height 1.1
RU-16_L [mm] "TSOP, 16-Leads, Body 5x4.4mm, Pitch 0.65mm, IPC High Density"
  oval 1.4x0.35 smd: 1(-2.8,2.275) 2(-2.8,1.625) 3(-2.8,0.975) 4(-2.8,0.325) 5(-2.8,-0.325) 6(-2.8,-0.975) 7(-2.8,-1.625) 8(-2.8,-2.275) 9(2.8,-2.275) 10(2.8,-1.625) 11(2.8,-0.975) 12(2.8,-0.325) 13(2.8,0.325) 14(2.8,0.975) 15(2.8,1.625) 16(2.8,2.275)
  silkscreen extent -2.93,-2.55 1.7,3.12, body extent -2.25,-2.55 2.25,2.55, height 1.2
SIM5051-6 [mm] "Mini SIM Connector, 6 pos, Hinged Lid"
  rect 2x1.6 smd: 1(0,0) 2(2.54,0) 3(5.08,0) 5(0,-17.7) 6(2.54,-17.7) 7(5.08,-17.7)
  silkscreen extent -4.95,-24 12.15,0.8, body extent -5,-24 12.2,0.8, height 1.85
SOD323 [mm] "SOD-323/SC-76; 2 Leads; Body 1.7 x 1.3 mm, (LxW)"
  rect 1.45x0.55 smd: 1(1.175,0) 2(-1.175,0)
  silkscreen extent -0.95,-0.75 0.95,0.75
SOD-923 [mm] "Diode, 1.0x0.6 Body"
  rect 0.36x0.25 smd: 1(0,0) 2(0.84,0)
  silkscreen extent 1.3,-0.3 1.3,0.3, body extent 0,-0.3 0.9,0.3, height 0.4
SOT23-3_L [mm] "SOT23, 3-Leads, Body 2.9x1.3mm, Pitch 0.95mm, Lead Span 2.4mm, IPC High Density"
  rect 1.2x0.6 smd: 1(-0.9,0.95) 2(-0.9,-0.95) 3(0.9,0)
  silkscreen extent -1.02,-1.5 0.7,1.92, body extent -0.7,-1.52 0.7,1.52, height 1.12
SOT23-6_L [mm] "SOT23, 6-Leads, Body 2.9x1.6mm, Pitch 0.95mm, Lead Span 2.7mm, IPC High Density"
  rect 0.9x0.65 smd: 1(-1.2,0.95) 2(-1.2,0) 3(-1.2,-0.95) 4(1.2,-0.95) 5(1.2,0) 6(1.2,0.95)
  silkscreen extent -1.33,-1.55 0.35,1.95, body extent -0.9,-1.55 0.9,1.55, height 1.45
SOT-665 [mm] "SOT-665"
  rect 0.375x0.5 smd: 1(0,0) 3(1,0)
  rect 0.3x0.65 smd: 2(0.5,-0.075)
  rect 0.45x0.5 smd: 4(1,1.7) 5(0,1.7)
  silkscreen extent -0.5,-0.4 1.5,2, body extent -0.5,-0.1 1.5,1.7, height 0.6
SPAK-7 [mm] "SPak-7 (7 Leads + Tab)"
  rect 0.9x2 smd: 1(0,0) 2(1.27,0) 3(2.54,0) 4(3.81,0) 5(5.08,0) 6(6.35,0) 7(7.62,0)
  rect 10x9 smd: TAB(3.81,6.5)
  silkscreen extent -1.7,-0.1 9.3,11.4, body extent -1.2,-1 8.8,11, height 2.03
SRU1048 [mm] "Bourns SRU1048 SMD Inductor"
  rect 1.8x3.6 smd: 1(0,0) 2(8.1,0)
  silkscreen extent -1.15,-5.2 9.25,5.2, body extent -1.2,-5.2 9.3,5.3, height 4.8
"TE 1775838-2" [mm] "TE Mini PCIe 52 Pin RA SMD Connector"
  rect 0.6x2 smd: 1(0,0) 2(0.4,8.2) 3(0.8,0) 4(1.2,8.2) 5(1.6,0) 6(2,8.2) 7(2.4,0) 8(2.8,8.2) 9(3.2,0) 10(3.6,8.2) 11(4,0) 12(4.4,8.2) 13(4.8,0) 14(5.2,8.2) 15(5.6,0) 16(6,8.2) 17(9.6,0) 18(10,8.2) 19(10.4,0) 20(10.8,8.2) 21(11.2,0) 22(11.6,8.2) 23(12,0) 24(12.4,8.2) 25(12.8,0) 26(13.2,8.2) 27(13.6,0) 28(14,8.2) 29(14.4,0) 30(14.8,8.2) 31(15.2,0) 32(15.6,8.2) 33(16,0) 34(16.4,8.2) 35(16.8,0) 36(17.2,8.2) 37(17.6,0) 38(18,8.2) 39(18.4,0) 40(18.8,8.2) 41(19.2,0) 42(19.6,8.2) 43(20,0) 44(20.4,8.2) 45(20.8,0) 46(21.2,8.2) 47(21.6,0) 48(22,8.2) 49(22.4,0) 50(22.8,8.2) 51(23.2,0) 52(23.6,8.2)
  round 0 hole 1.6 unplated: MH1(-0.7,4.1)
  round 0.1 on Mech15: MH1(-0.3,52.15) MH2(23.9,52.15)
  round 0 hole 1.2 unplated: MH2(24.3,4.1)
  rect 2.3x3.2 smd: MP1(-2.85,0.6) MP2(26.45,0.6)
  silkscreen extent -3.7,-0.5 27.3,55.05, body extent -3.7,-0.5 27.3,55.1, height 6.5
"TE 2199119-4" [mm] "TE NextGen Form Factor Key E SMD Socket"
  rect 0.3x1.55 smd mask+0.102: 1(0,0) 2(0.25,-7.55) 3(0.5,0) 4(0.75,-7.55) 5(1,0) 6(1.25,-7.55) 7(1.5,0) 8(1.75,-7.55) 9(2,0) 10(2.25,-7.55) 11(2.5,0) 12(2.75,-7.55) 13(3,0) 14(3.25,-7.55) 15(3.5,0) 16(3.75,-7.55) 17(4,0) 18(4.25,-7.55) 19(4.5,0) 20(4.75,-7.55) 21(5,0) 22(5.25,-7.55) 23(5.5,0) 32(7.75,-7.55) 33(8,0) 34(8.25,-7.55) 35(8.5,0) 36(8.75,-7.55) 37(9,0) 38(9.25,-7.55) 39(9.5,0) 40(9.75,-7.55) 41(10,0) 42(10.25,-7.55) 43(10.5,0) 44(10.75,-7.55) 45(11,0) 46(11.25,-7.55) 47(11.5,0) 48(11.75,-7.55) 49(12,0) 50(12.25,-7.55) 51(12.5,0) 52(12.75,-7.55) 53(13,0) 54(13.25,-7.55) 55(13.5,0) 56(13.75,-7.55) 57(14,0) 58(14.25,-7.55) 59(14.5,0) 60(14.75,-7.55) 61(15,0) 62(15.25,-7.55) 63(15.5,0) 64(15.75,-7.55) 65(16,0) 66(16.25,-7.55) 67(16.5,0) 68(16.75,-7.55) 69(17,0) 70(17.25,-7.55) 71(17.5,0) 72(17.75,-7.55) 73(18,0) 74(18.25,-7.55) 75(18.5,0)
  round 0 hole 1.2 unplated: MH1(-0.75,-5.275)
  round 0.1 on Mech15: MH1(32.75,-74.575) MH2(-14.25,-74.575)
  round 0 hole 1.7 unplated: MH2(19.25,-5.275)
  rect 1.2x2.75 smd mask+0.102: MP1(-1.1,-0.775) MP2(19.6,-0.775)
  silkscreen extent -1.75,-7.9 20.25,0.35, body extent -17.25,-78.67 35.75,0.75, height 5.2
TI-DBV5_L [mm] "SOT23, 5-Leads, Body 2.9x1.6mm, Pitch 0.95mm, IPC High Density"
  rect 0.9x0.6 smd: 1(-1.2,0.95) 2(-1.2,0) 3(-1.2,-0.95) 4(1.2,-0.95) 5(1.2,0.95)
  silkscreen extent -1.33,-1.55 0.35,1.92, body extent -0.87,-1.52 0.87,1.53, height 1.45
"TS 100 PIN HEADER" [mm] "Amphenol 100 pos SMD Connector, Plug, Center Strip Contacts"
  rect 0.5x2 smd: 1(0,0) 2(0,4.4) 3(0.8,0) 4(0.8,4.4) 5(1.6,0) 6(1.6,4.4) 7(2.4,0) 8(2.4,4.4) 9(3.2,0) 10(3.2,4.4) 11(4,0) 12(4,4.4) 13(4.8,0) 14(4.8,4.4) 15(5.6,0) 16(5.6,4.4) 17(6.4,0) 18(6.4,4.4) 19(7.2,0) 20(7.2,4.4) 21(8,0) 22(8,4.4) 23(8.8,0) 24(8.8,4.4) 25(9.6,0) 26(9.6,4.4) 27(10.4,0) 28(10.4,4.4) 29(11.2,0) 30(11.2,4.4) 31(12,0) 32(12,4.4) 33(12.8,0) 34(12.8,4.4) 35(13.6,0) 36(13.6,4.4) 37(14.4,0) 38(14.4,4.4) 39(15.2,0) 40(15.2,4.4) 41(16,0) 42(16,4.4) 43(16.8,0) 44(16.8,4.4) 45(17.6,0) 46(17.6,4.4) 47(18.4,0) 48(18.4,4.4) 49(19.2,0) 50(19.2,4.4) 51(20,0) 52(20,4.4) 53(20.8,0) 54(20.8,4.4) 55(21.6,0) 56(21.6,4.4) 57(22.4,0) 58(22.4,4.4) 59(23.2,0) 60(23.2,4.4) 61(24,0) 62(24,4.4) 63(24.8,0) 64(24.8,4.4) 65(25.6,0) 66(25.6,4.4) 67(26.4,0) 68(26.4,4.4) 69(27.2,0) 70(27.2,4.4) 71(28,0) 72(28,4.4) 73(28.8,0) 74(28.8,4.4) 75(29.6,0) 76(29.6,4.4) 77(30.4,0) 78(30.4,4.4) 79(31.2,0) 80(31.2,4.4) 81(32,0) 82(32,4.4) 83(32.8,0) 84(32.8,4.4) 85(33.6,0) 86(33.6,4.4) 87(34.4,0) 88(34.4,4.4) 89(35.2,0) 90(35.2,4.4) 91(36,0) 92(36,4.4) 93(36.8,0) 94(36.8,4.4) 95(37.6,0) 96(37.6,4.4) 97(38.4,0) 98(38.4,4.4) 99(39.2,0) 100(39.2,4.4)
  round 0.2 hole 1.2 unplated: MH1(-2.5,2.2)
  round 0.2 hole 0.8 unplated: MH2(41.7,2.2)
  silkscreen extent -3.3,-1.74 42.5,5.2, body extent -3.3,-0.8 42.5,5.2, height 5.7
TS-4900 [mm] "TS-4900 Mechanical Outline"
  round 0.4 on Mech15: MGL(4.8,24) MGR(70.2,31) MH(4,51.5) MH(71.5,3.5)
  silkscreen extent 0,0 75,55, body extent 0,0 75,55, height 12
TSSOP20_L [mm] "TSOP, 20-Leads, Body 6.5x4.4mm, Pitch 0.65mm, IPC High Density"
  oval 1.4x0.35 smd: 1(-2.8,2.925) 2(-2.8,2.275) 3(-2.8,1.625) 4(-2.8,0.975) 5(-2.8,0.325) 6(-2.8,-0.325) 7(-2.8,-0.975) 8(-2.8,-1.625) 9(-2.8,-2.275) 10(-2.8,-2.925) 11(2.8,-2.925) 12(2.8,-2.275) 13(2.8,-1.625) 14(2.8,-0.975) 15(2.8,-0.325) 16(2.8,0.325) 17(2.8,0.975) 18(2.8,1.625) 19(2.8,2.275) 20(2.8,2.925)
  silkscreen extent -2.93,-3.3 1.7,3.77, body extent -2.25,-3.3 2.25,3.3, height 1.1
"WE-LQS 252012" [mm] "SMD Power Inductor, 2-Leads, Body 2.5x2.0mm"
  rect 0.85x2 smd: 1(-0.825,0) 2(0.825,0)
  body extent -1.25,-1 1.25,1, height 1.18
"WURTH 9774015243R" [mm] "Wurth 1.5mm SMD Threaded Standoff"
  round 5.3 hole 3 paste+0: MH(0,0)
  body extent -2.7,-2.7 2.7,2.7, height 1.5
"WURTH 9774030243R" [mm] "Wurth 3mm SMD Threaded Standoff"
  round 5.3 hole 3 paste+0: MH(0,0)
  body extent -2.7,-2.7 2.7,2.7, height 3
"WURTH 9774060360R" [mm] "Wurth 6mm SMD Threaded Standoff"
  round 7.4 hole 4.4 paste-4: 1(0,0)
  body extent -3.7,-3.7 3.7,3.7, height 6

## Part data
BT1: "BATTERY HOLDER COIN 20MM PC PIN", Manufacturer="MPD (Memory Protection Devices)", Manufacturer Part Number=BS-7, Supplier 1 Part Number=BS-7-ND, Supplier 1=Digi-Key
C1 C2 C3 C4 C5 C6 C7 C8 C9 C10 C11 C12 C13 C14 C15 C16 C17 C18 C19 C20 C21 C22 C23 C24 C25 C26 C27 C28 C29 C30 C31 C32 C33 C34 C36 C37 C38 C39 C40 C41 C42 C43 C44 C46 C47 C48 C50: library part Cap, "Capacitor"
C35: library part "Cap Pol1", "CAP 500MF -10% +30% 5.5V TH", Manufacturer="Illinois Capacitor", Manufacturer Part Number=DGH504Q5R5, Supplier 1 Part Number=1572-1776-ND, ComponentLink1Descrption="Data Sheet", ComponentLink1URL="S:\Hardware\Data Sheets\Passive\Capacitors\DGH series.pdf", Supplier 1=Digi-Key
C45 C49: library part "Cap Pol3", "CAP TANT 10UF 20% 10V 0805", Manufacturer="AVX Corporation", Manufacturer Part Number=TLJR106M010R3000, Supplier 1 Part Number=478-3346-1-ND, Supplier 1=Digi-Key
D1 D8 D11: library part LED2, "LED GREEN CLEAR 0603 SMD", Manufacturer="Wurth Electronics Inc", Manufacturer Part Number=150060VS75000, Supplier 1 Part Number=732-4980-1-ND, Supplier 1=Digi-Key
D2: library part 82402374, "TVS DIODE 3.3V 12V SOT665", Manufacturer="Nexperia USA Inc", Supplier 1 Part Number=1727-5790-1-ND, ComponentLink1Description="Data Sheet", ComponentLink1URL="S:\Hardware\Data Sheets\Passive\TVS\PESDXL4UF_G_W.pdf", Manufacturer Part Number=PESD3V3L4UW,115, Supplier 1=Digi-Key
D3 D4: library part "D Zener", "TVS DIODE 5V 9.8V SOD923", Manufacturer="ON Semiconductor", Supplier 1 Part Number=ESD9L5.0ST5GOSCT-ND, Manufacturer Part Number=ESD9L5.0ST5G, Supplier 1=Digi-Key
D5: library part BAS70, "DIODE SCHOTTKY 100V 20A D2PAK", Manufacturer=STMicroelectronics, Supplier 1 Part Number=497-10993-1-ND, ComponentLink2Description=Datasheet, ComponentLink2URL="S:\Hardware\Data Sheets\Passive\Diodes\STPS20M100.pdf", Manufacturer Part Number=STPS20M100SG, Supplier 1=Digi-Key
D6: "DIODE ZENER 10V 225MW SOT23-3", Manufacturer="On Semiconductor", Supplier 1 Part Number=BZX84C10LT1GOSCT-ND, ComponentLink1Description="Data Sheet", ComponentLink1URL="S:\Hardware\Data Sheets\Passive\Diodes\BZX84C2V4LT1-D.pdf", Manufacturer Part Number=BZX84C10LT1G, Supplier 1=Digi-Key
D7: library part "D Schottky", "Schottky Diode", Manufacturer="Toshiba Semiconductor and Storage", Manufacturer Part Number=CUS10S30,H3F, Supplier 1 Part Number=CUS10S30H3FCT-ND, Supplier 1=Digi-Key
D9: library part "D Schottky", "DIODE SCHOTTKY 30V 30MA SOD523", Manufacturer="ON Semiconductor", Manufacturer Part Number=RB751S40T1G, Supplier 1 Part Number=RB751S40T1GOSCT-ND, Supplier 1=Digi-Key
D10: library part LED2, "LED RED CLEAR 0603 SMD", Manufacturer="Wurth Electronics Inc", Manufacturer Part Number=150060RS75000, Supplier 1 Part Number=732-4978-1-ND, Supplier 1=Digi-Key
F1: library part "Fuse Thermal", "Thermal Fuse", Manufacturer="Littelfuse Inc", Manufacturer Part Number=SMDC300F/24-2, Supplier 1 Part Number=SMDC300F/24-2CT-ND, Supplier 1=Digi-Key
H1 H2: library part "SMD 1.5mm Spacer", "RND STANDOFF M2X0.4 STEEL", Manufacturer="Wurth Electronics Inc", Supplier 1 Part Number=732-7069-1-ND, ComponentLink1Description=Drawing, ComponentLink1URL="S:\Hardware\Data Sheets\Passive\Standoffs\Wurth 9774015243R.pdf", Height=1.5mm, Manufacturer Part Number=9774015243R, Supplier 1=Digi-Key
H3 H4 H7 H8 H9: library part "Cable Clip", "CBL CLIP C-TYPE SILVER SOLDER", Manufacturer="Harwin Inc", Supplier 1 Part Number=952-1576-1-ND, ComponentLink1Description=Drawing, ComponentLink1URL="S:\Hardware\Data Sheets\Passive\Strain Reliefs\S8101R.pdf", Manufacturer Part Number=S8101-46R, Supplier 1=Digi-Key
H5 H6: library part "SMD M3 Spacer", "ROUND STANDOFF M2X0.4 STEEL 3MM", Manufacturer="Wurth Electronics Inc", Supplier 1 Part Number=732-7085-1-ND, ComponentLink1Description=Drawing, ComponentLink1URL="S:\Hardware\Data Sheets\Passive\Standoffs\Wurth 9774070360R.pdf", Height=3mm, Manufacturer Part Number=9774030243R, Supplier 1=Digi-Key
H13 H14: library part "SMD M3 Spacer", "ROUND STANDOFF M3X0.5 STEEL 6MM", Manufacturer="Wurth Electronics Inc", Manufacturer Part Number=9774060360R, Supplier 1 Part Number=732-5273-1-ND, ComponentLink1Description=Drawing, ComponentLink1URL="S:\Hardware\Data Sheets\Passive\Spacers\Wurth 9774060360R.pdf", Height=6mm, Supplier 1=Digi-Key
J1: library part TE2199119-4, "CONN FEMALE 67POS 0.020 GOLD", Manufacturer="TE Connectivity AMP Connectors", Supplier 1 Part Number=A115900CT-ND, ComponentLink1Description="Data Sheet", ComponentLink1URL="S:\Hardware\Data Sheets\Passive\Connectors\TE NGFF M2 Connector.pdf", Manufacturer Part Number=2199119-4, Supplier 1=Digi-Key
J2: library part TE1775838-2, "CONN PCI EXP MINI FEMALE 52POS", Manufacturer="TE Connectivity AMP Connectors", Supplier 1 Part Number=A123340CT-ND, ComponentLink1Description="Data Sheet", ComponentLink1URL="S:\Hardware\Data Sheets\Passive\Connectors\TE Mini PCIe 52 Pin Connector.pdf", ComponentLink2Description="SIM7600 PCIe HW Design Guide", ComponentLink2URL="S:\Hardware\Data Sheets\Active\Modems\SIM7600 PCIe Hardware Design Guide.pdf", Manufacturer Part Number=1775838-2, Supplier 1=Digi-Key
J3: library part "Mini SIM 6pos Conn", "MINI SIM HINGED, 6P, SMT, 1.8MM", Manufacturer=GCT, Supplier 1 Part Number=2073-SIM5051-6-0-18-00-ACT-ND, ComponentLink1Description="Data Sheet", ComponentLink1URL="S:\Hardware\Data Sheets\Passive\Connectors\sim5051.pdf", Manufacturer Part Number=SIM5051-6-0-18-00-A, Supplier 1=Digi-Key
J4 J5: library part "Header 50 x 2", "CONN PLUG 100POS SMD GOLD", Manufacturer="Amphenol ICC (FCI)", Supplier 1 Part Number=609-1693-1-ND, ComponentLink1Description="Drawing 1", ComponentLink1URL="S:\Hardware\Data Sheets\Passive\Connectors\61083.pdf", ComponentLink2Description="Drawing 2", ComponentLink2URL="S:\Hardware\Data Sheets\Passive\Connectors\cn-tssocket-m-spec.pdf", Manufacturer Part Number=61083-102402LF, Supplier 1=Digi-Key
  J4: Note="Left Header"
  J5: Note="Right Header"
J6: library part "Header 4H", "TERM BLK 2POS SIDE ENT 3.5MM PCB", Manufacturer=Weidmuller, Supplier 1 Part Number=281-2020-ND, Manufacturer Part Number=1824420000, Supplier 1=Digi-Key
L1 L3: library part "Inductor Iron", "FIXED IND 1UH 4.3A 42 MOHM SMD", Manufacturer="Murata Electronics", Manufacturer Part Number=DFE252012P-1R0M=P2, Supplier 1 Part Number=490-10647-1-ND, Supplier 1=Digi-Key
L2: library part "Inductor Iron", "6.8µH Shielded Fixed Inductor", Manufacturer="Murata Electronics", Manufacturer Part Number=1267AY-6R8N=P3, Supplier 1 Part Number=490-14066-1-ND, Supplier 1=Digi-Key
L4: library part "Inductor Iron", "FIXED IND 3UH 6.2A 7.2 MOHM SMD", Manufacturer="Bourns Inc", Manufacturer Part Number=SRU1048-3R0Y, Supplier 1 Part Number=SRU1048-3R0YCT-ND, ComponentLink1Description="Data Sheet", ComponentLink1URL="S:\Hardware\Data Sheets\Passive\Inductors\SRU1048.pdf", Supplier 1=Digi-Key
Q1 Q3 Q4: "MOSFET N-CH 60V 115MA SOT-23", Manufacturer="ON Semiconductor", Supplier 1 Part Number=2N7002NCT-ND, ComponentLink1Description="Data Sheet", ComponentLink1URL="S:\Hardware\Data Sheets\Active\Transistors\FETs\NDS7002A-D.pdf", Manufacturer Part Number=2N7002, PartNumber=2N7002, Supplier 1=Digi-Key
Q2: library part NTGS3136PT1G, "MOSFET P-CH 60V TSOT26", Manufacturer="Diodes Incorporated", Supplier 1 Part Number=DMP6110SVT-7DICT-ND, ComponentLink1Description="Data Sheet", ComponentLink1URL="S:\Hardware\Data Sheets\Passive\FETs\DMP6110SVT.pdf", Manufacturer Part Number=DMP6110SVT-7, Supplier 1=Digi-Key
R1 R2 R3 R4 R5 R6 R7 R8 R9 R11 R12 R13 R14 R15 R16 R17 R18 R19 R22 R23 R24 R25 R27 R28 R29 R30 R31 R32 R33 R34 R35 R36 R37 R38 R39 R40 R41 R42 R43 R44 R45 R46 R47 R48 R49 R50 R51 R52 R53 R54 R55 R56 R57: library part Res3, "Resistor"
R10: library part "Res Varistor", "VARISTOR 5.35V 120A 0805", Manufacturer="Littelfuse Inc", Manufacturer Part Number=V3.5MLA0805H, Supplier 1 Part Number=F2206CT-ND, Supplier 1=Digi-Key
R20: library part "Res Varistor", "VARISTOR 8.2V 120A 0805", Manufacturer="Littelfuse Inc", Manufacturer Part Number=V5.5MLA0805H, Supplier 1 Part Number=F2215CT-ND, Supplier 1=Digi-Key
R21: library part "Res Varistor", "VARISTOR 18.1V 120A 0805", Manufacturer="Littelfuse Inc", Manufacturer Part Number=V14MLA0805NH, Supplier 1 Part Number=F3734CT-ND, Supplier 1=Digi-Key
R26: library part Res3, "RES SMD 3.3 OHM 5% 3W 2512", Manufacturer="TE Connectivity Passive Product", Manufacturer Part Number=35223R3JT, Supplier 1 Part Number=A121247CT-ND, Supplier 1=Digi-Key
U1: library part ADG3300BRUZ, "IC TRNSLTR BIDIRECTIONAL 20TSSOP", Manufacturer="Texas Instruments", Supplier 1 Part Number=296-21527-1-ND, ComponentLink1Description="Data Sheet", ComponentLink1URL="S:\Hardware\Data Sheets\Active\Logic\txb0108.pdf", Manufacturer Part Number=TXB0108PWR, Supplier 1=Digi-Key
U2: library part LMR14050, "IC REG BUCK ADJUSTABLE 5A 8SOPWR", Manufacturer="Texas Instruments", Supplier 1 Part Number=296-44322-1-ND, ComponentLink1Description="Data Sheet", ComponentLink1URL="S:\Hardware\Data Sheets\Active\Voltage Regulators\lmr14050.pdf", Manufacturer Part Number=LMR14050SDDAR, Supplier 1=Digi-Key
U3: library part MIC69502, "IC REG LINEAR POS ADJ 5A SPAK-7", Manufacturer="Microchip Technology", Supplier 1 Part Number=MIC69502WR-CT-ND, ComponentLink1Description="Data Sheet", ComponentLink1URL="S:\Hardware\Data Sheets\Active\Voltage Regulators\mic69502.pdf", Manufacturer Part Number=MIC69502WR-TR, Supplier 1=Digi-Key
U4: library part TS-4900
U5: "1 MHz, 45 uA, RRIO, Single Operational Amplifier, 2.1 to 5.5 V, -40 to 125 degC, 5-pin SOT23 (DBV5), Green (RoHS & no Sb/Br)", Manufacturer="Texas Instruments", Supplier 1 Part Number=296-12276-1-ND, ComponentLink1Description="Data Sheet", ComponentLink1URL="S:\Hardware\Data Sheets\Active\Amps\opa2348.pdf", Manufacturer Part Number=OPA348AIDBVT, Supplier 1=Digi-Key
U6: "IC ADC 12BIT SAR 16TSSOP", Manufacturer="Analog Devices Inc", Supplier 1 Part Number=AD7923BRUZ-REEL7CT-ND, ComponentLink1Description="Data Sheet", ComponentLink1URL="S:\Hardware\Data Sheets\Active\ADCs\AD7923-1.pdf", Manufacturer Part Number=AD7923BRUZ-REEL7, Supplier 1=Digi-Key
U7: library part MAX6610AUT+, "IC VREF SERIES 0.1% SOT23-6", Manufacturer="Microchip Technology", Supplier 1 Part Number=MCP1501T-25E/CHYCT-ND, ComponentLink1Description="Data Sheet", ComponentLink1URL="S:\Hardware\Data Sheets\Active\References\MCP1501.pdf", Manufacturer Part Number=MCP1501T-25E/CHY, Supplier 1=Digi-Key

## Via types
v1: diameter 18, hole 8, Component Side to Solder Side, 198 vias
v2: diameter 26, hole 16, Component Side to Solder Side, 88 vias

## Nets (pads, with @x,y where several pads share a name; then routed paths per layer and width w, separated by ;. In a path a pad name is that pad's centre, name@x,y a point inside that pad or via, vN(x,y) a via of type N, cw(c..) or ccw(c..) an arc to the next point about the centre after c; other vN are vias at no path point)
1.8V: C10.1 J5.63 U1.2 U1.10 | length 1515.4
  Component Side w10: J5.63@2359.13,4298.19 2359.13,4359.13 v1(2370,4370) ; v1(3170,3680) v1(3170,3845)
  Solder Side w10: v1(2370,4370) 2471.25,4370 2536.25,4305 2840,4305 3020,4125 3020,3865 3040.43,3844.57 U1.2@3100.24,3844.57 3169.57,3844.57 v1(3170,3845) ; U1.10@3100.24,3639.84 3159.84,3639.84 3170,3650 v1(3170,3680)
3.3V: C11.1 C45.1 C46.1 D10.1 D11.1 J4.12 J5.13 J5.39 J5.79 R2.2 R4.1 R8.2 R27.2 R30.1 R40.1 R41.2 R43.2 R46.1 R48.1 U1.19 U6.15 | length 17129.9
  Component Side w10: C45.1@1504.53,2330 1509.68,2324.84 C46.1@1509.68,2270 ; 1510,2055 1509.68,2055.32 C46.1@1509.68,2270 ; U6.15@1584.76,2271.02 1510.71,2271.02 C46.1@1509.68,2270 ; v1(2611.1,4226.1) J5.79@2611.1,4298.19 ; 3415,1310 3415.31,1310.31 R27.2@3415.31,1495
  Component Side w15: J4.12@1815.83,1896.61 1815.83,2055 ; J5.39@1981.18,4298.19 1981.18,4398.82 1980,4400 ; v1(2195,2145) 1855,2145 1815.83,2105.83 1815.83,2055 ; v1(2245,2095) 2480,2095 ; R30.1@2314.53,4820 2314.53,4890 ; R40.1@2480,2024.68 2480,2095 ; J5.79@2611.1,4298.19 2611.1,4388.9 2600,4400 1980,4400 ; R41.2@2665,1550.31 2665,1315 2660,1310 ; R4.1@2695.47,4820 2695.47,4899.53 ; R43.2@2795,1550.31 2795,1310 ; R46.1@2960,2024.68 2960,2090 2955,2095 ; R48.1@3000,2024.68 3000,2090 2995,2095 2955,2095 ; v1(4030,4695) 3800,4695 3595.47,4899.53 2695.47,4899.53 ; v1(4665,2335) 4690,2335 4710,2315 4710,1405 4615,1310 3415,1310 2795,1310 ; 1165,2055 1165,4195 ; 1165,2055 1165,1440 1295,1310 2660,1310 ; 1165,2055 1510,2055 1815.83,2055 ; 1165,4195 1555,4195 1571.73,4211.73 J5.13@1571.73,4298.19 1571.73,4381.73 1590,4400 1980,4400 ; 1165,4195 1165,4775 1198.46,4808.46 D10.1@1445,4808.46 D11.1@1500,4808.46 1568.46,4808.46 1659.53,4899.53 2695.47,4899.53 ; 2480,2095 2955,2095 ; 2660,1310 2795,1310
  Solder Side w10: v1(2611.1,4226.1) 2848.9,4226.1 2930,4145 C11.1@2930,3930 2930,3850 2924.57,3844.57 U1.19@2879.76,3844.57
  Solder Side w15: v1(2195,2145) v1(2245,2095) ; R8.2@3970,4694.69 3970.31,4695 v1(4030,4695) ; R2.2@4640,2380.31 4640,2335 v1(4665,2335)
3.8V: C33.1 C34.1 L2.1 R23.2 U3.5 U3.6 | length 50.3
  Component Side w10: R23.2@2545,3364.69 2545,3415
  other v2: 1630,3505 1710,3505 1675,3545 1630,3580 1710,3580
5V: C23.2 C24.2 C25.2 C27.2 C28.1 C29.1 C30.1 C31.1 C32.1 C36.1 C37.1 C38.1 C39.1 C40.1 C41.1 C42.1 C43.1 C47.1 C48.1 C49.1 C50.1 D7.1 J4.15 J4.16 J4.29 J4.47 L1.1 L4.2 R18.2 R20.2 R24.2 R26.1 U3.2 U3.3 U5.5 U6.5 U6.6 U7.4 U7.6 | length 2892.2
  Component Side w10: v1(1375,2480) C47.1@1375,2520.32 1377.72,2517.6 U5.5@1427.76,2517.6 ; v1(1700,2445) 1715,2460 C49.1@1715,2500.47 1720.16,2495.32 C50.1@1775,2495.32 1775,2465 1760,2450 1760,2375 1761.61,2373.39 U6.6@1805.24,2373.39 U6.5@1805.24,2347.8 ; v1(1955,2500) 1985,2500 2004.68,2480.32 C48.1@2004.68,2450 2029.49,2425.2 U7.6@2029.49,2382.4 2031.89,2380 2060,2380 2075,2365 2075,2320 2062.6,2307.6 U7.4@2029.49,2307.6 ; 3040,3415 3045,3410 R24.2@3045,3359.69 ; v1(3240,2590) 3294.68,2590 C28.1@3295,2590.32
  Component Side w19.6: J4.15@1878.82,1723.39 1878.82,1638.82 1865,1625 C36.1@1865,1584.68 C40.1@1900,1584.68 1900,1605 1920,1625 v1(1920,1635) ; J4.16@1878.82,1896.61 1878.82,1946.18 1870,1955 C43.1@1870,1980.32 C39.1@1905,1980.32 1949.68,1980.32 v1(1955,1975) ; J4.29@2099.29,1723.39 2099.29,1629.29 2085,1615 C41.1@2085,1584.68 C37.1@2120,1584.68 2120,1605 2145,1630 v1(2145,1635) ; J4.47@2382.76,1723.39 2382.76,1647.76 2370,1635 C42.1@2370,1584.68 C38.1@2405,1584.68 2429.68,1584.68 2445,1600 v1(2445,1615)
  Component Side w40: 3565,3405 3630,3405 3645,3420 4320,3420 4410,3330 v2(4410,3180)
  Solder Side w40: L1.1@4410,3062.48 v2(4410,3180)
  other v1: 3730,2840 3855,2845 3430,2860 3230,2910 3410,3000 3665,3000 3225,3060 3140,3110 3525,3120 3360,3185 3525,3260 3165,3280 3300,3320 3525,3380 2870,3430 2960,3430 3150,3435 3455,3445 3285,3455
4900RX_MODEMTX: D9.2 J4.34 | length 2161.2
  Component Side w10: J4.34@2162.28,1896.61 2162.28,1952.28 2170,1960 2170,2080 v1(2175,2085)
  Solder Side w10: v1(2175,2085) 2175,2100 2110,2165 2110,3485 2335,3710 D9.2@2557.44,3710
4900TX_MODEMRX: R36.1 U1.15 | length 2405.7
  Component Side w10: v1(2140,2080) 2140,2075 2145,2070 R36.1@2145,2019.68
  Solder Side w10: v1(2140,2080) 2140,2105 2135,2105 2085,2155 2085,3495 2337.59,3747.59 2638.82,3747.59 2642.6,3743.81 2879.76,3743.81 U1.15@2879.76,3742.2
A\D\C\_\C\S\: R52.2 U6.3 | length 1904.9
  Component Side w10: v1(1735,2025) 1735,2005 1710,1980 1635,1980 1615,1960 1615,1840 1655,1800 v1(2505,1800) ; v1(1735,2100) 1735,2285 1746.61,2296.61 U6.3@1805.24,2296.61 ; v1(2605,1505) R52.2@2605,1550.31
  Solder Side w10: v1(1735,2025) v1(1735,2100) ; v1(2505,1800) 2510,1800 2550,1760 2550,1560 v1(2605,1505)